# Allegro board Beamforming_PCB_Ver1_0_1.brd
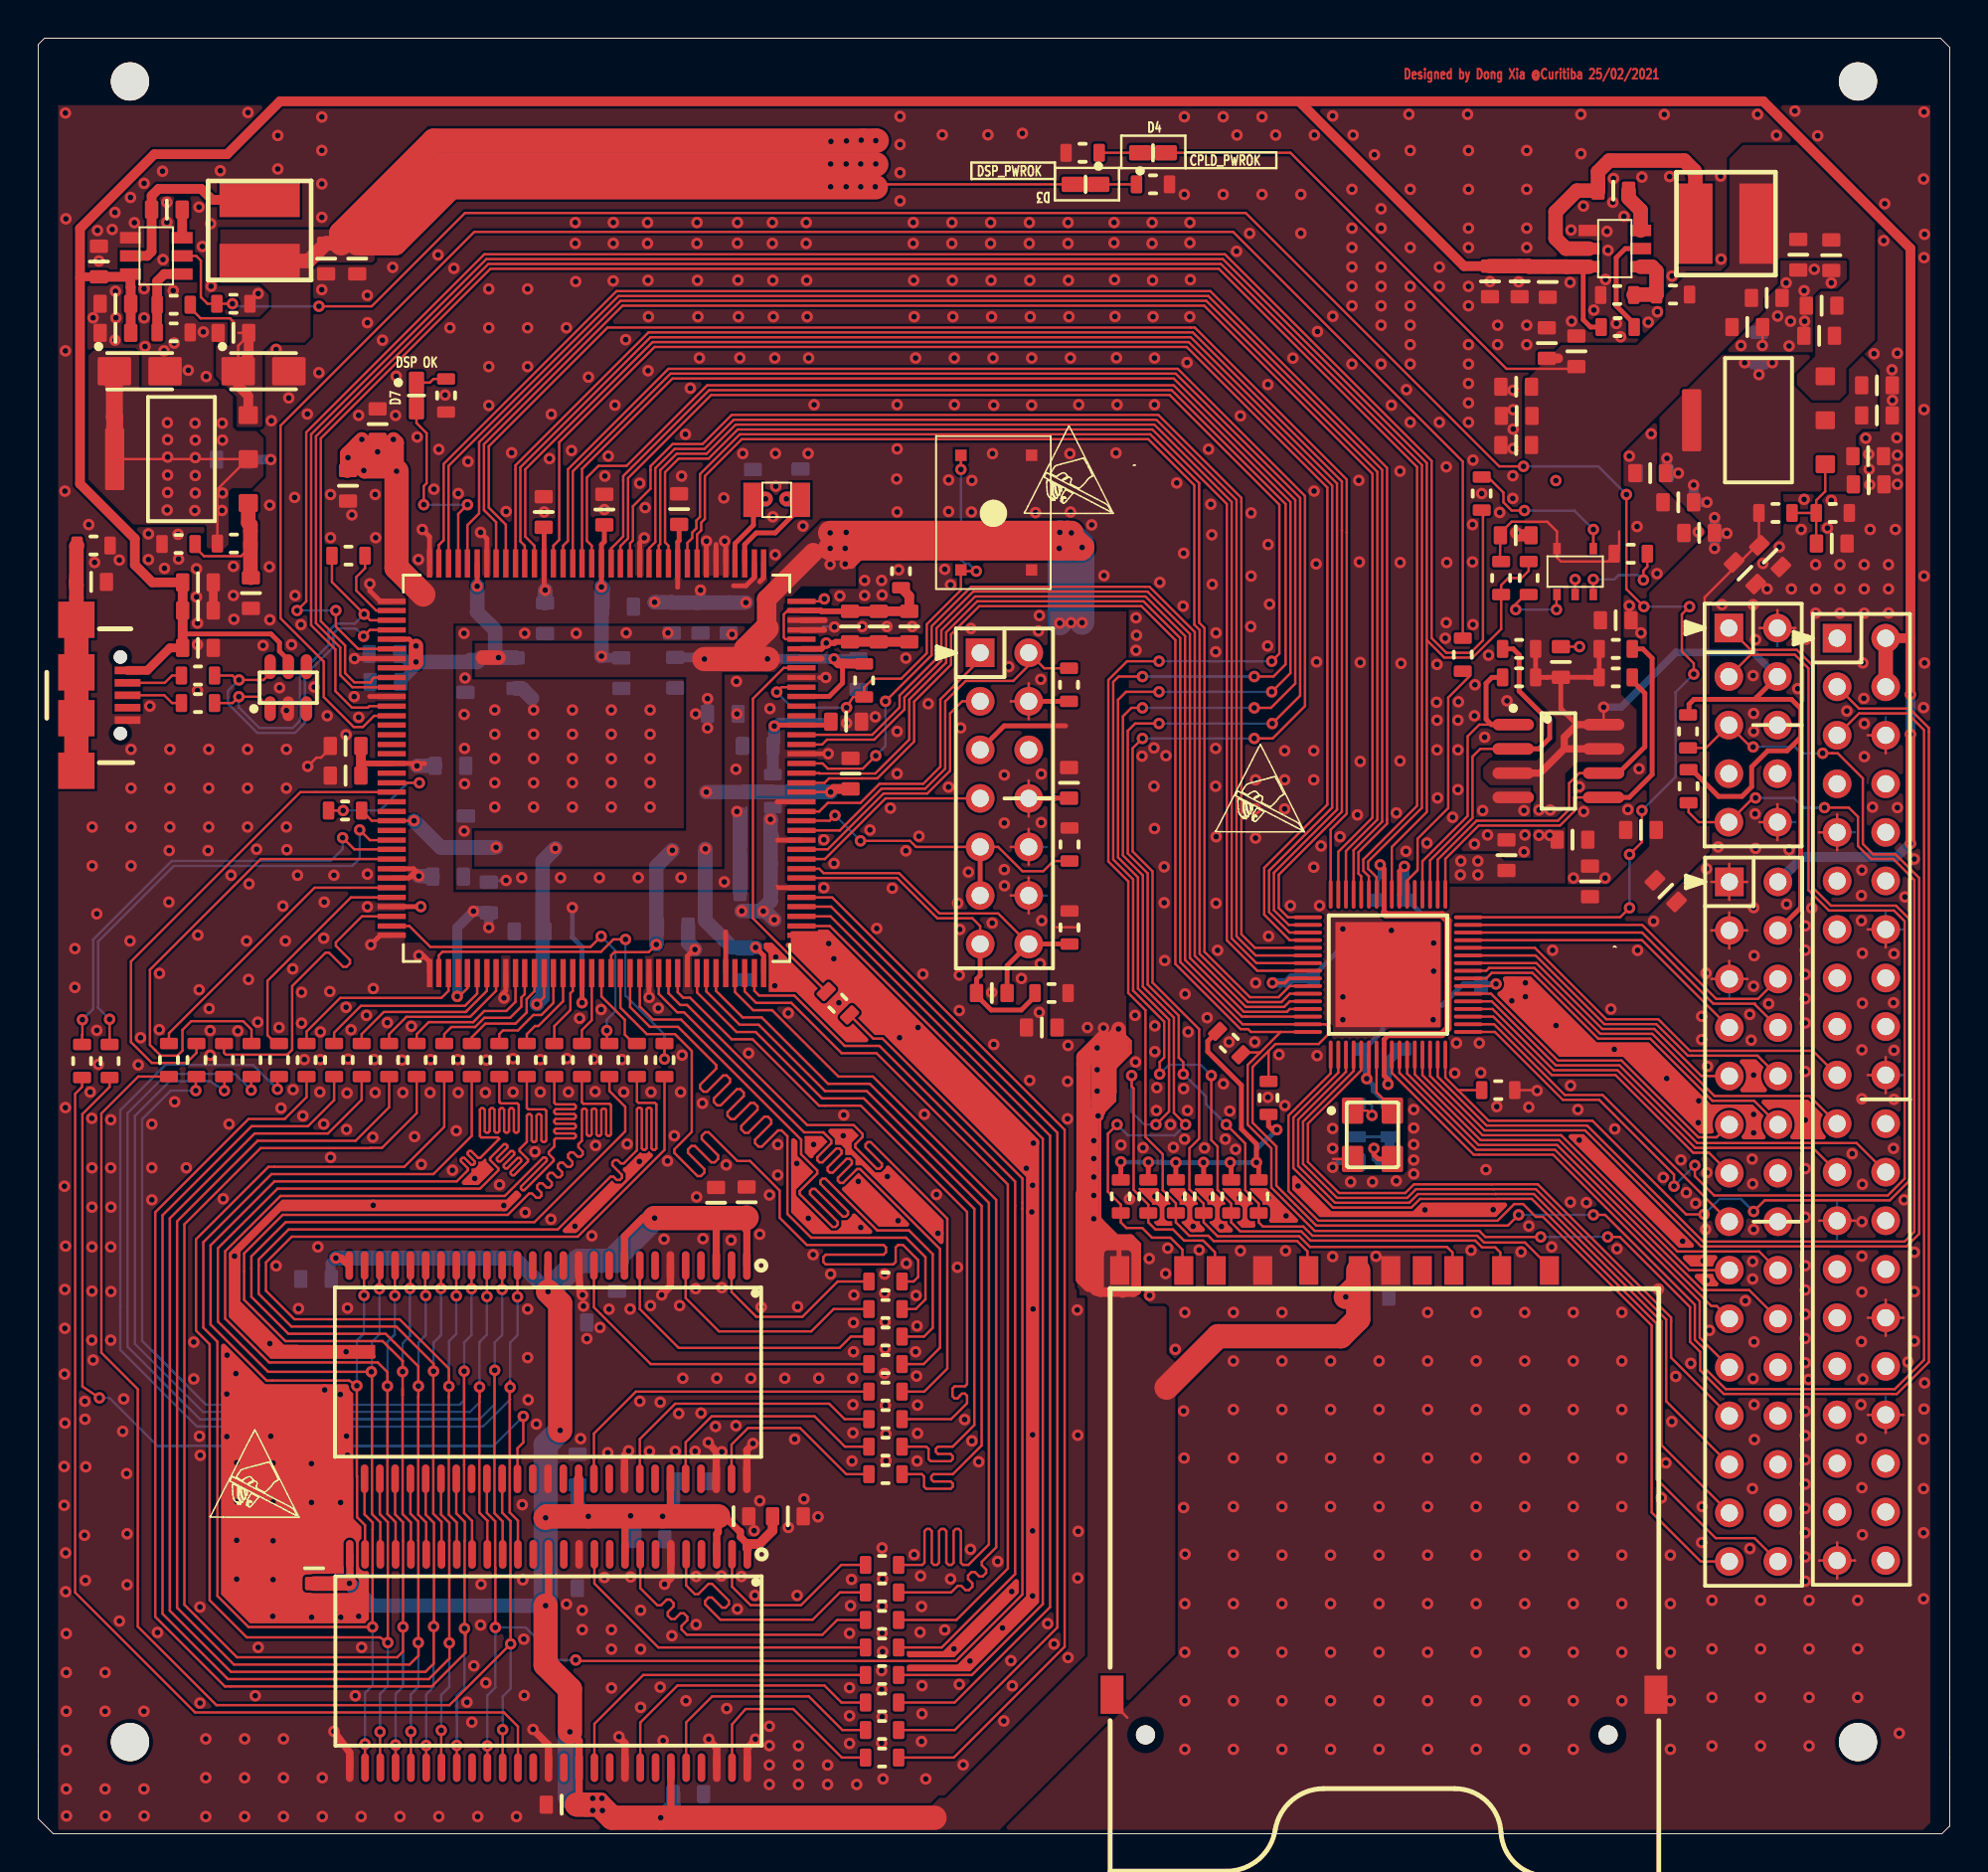
[diagram p0: board, top side]
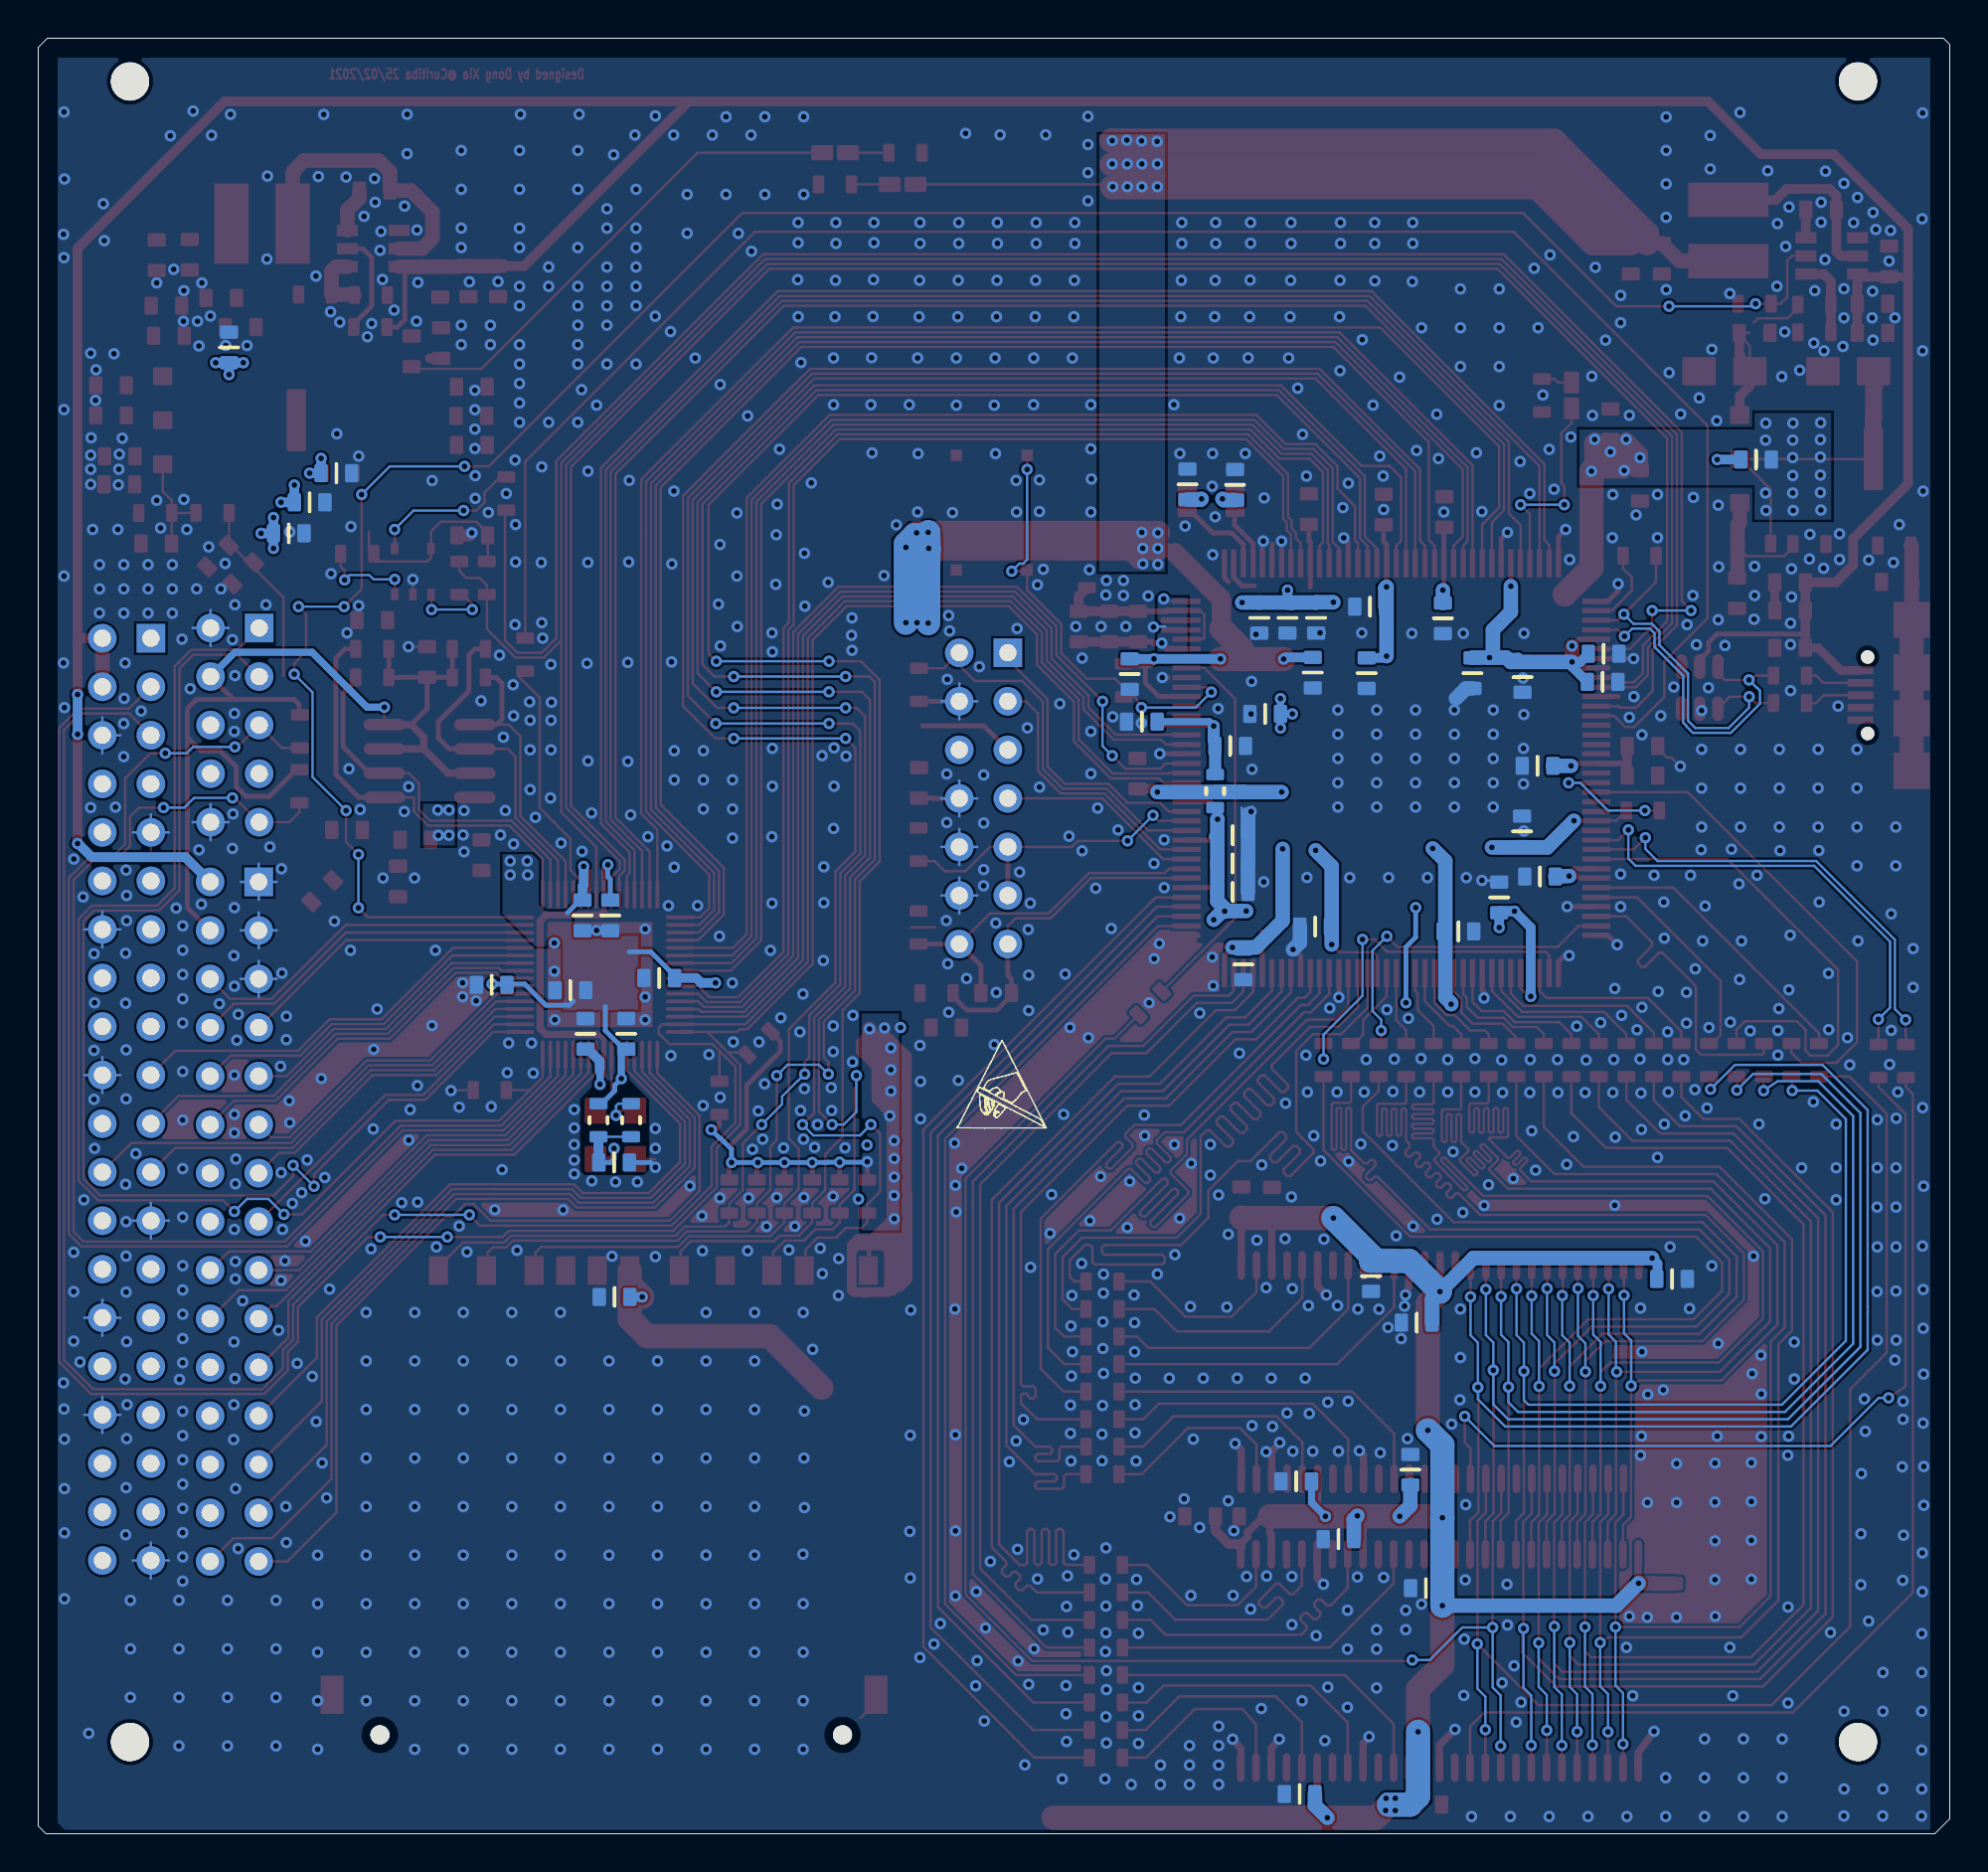
[diagram p1: board, bottom side, seen from below]

Outline 100 x 93.95 mm; copper layers: TOP, BOTTOM. Coordinates in mm from the lower left corner of the outline.
Outline path: 0,93.62 0,0.79 0.79,0 99.59,0 100,0.41 100,93.47 99.52,93.95 0.33,93.95 0,93.62

## Design rules (mm)
net group DSP_D0: nets DSP_D0 SEMC_D0
net group DSP_D1: nets DSP_D1 SEMC_D1
net group DSP_D2: nets DSP_D2 SEMC_D2
net group DSP_D3: nets DSP_D3 SEMC_D3
net group DSP_D4: nets DSP_D4 SEMC_D4
net group DSP_D5: nets DSP_D5 SEMC_D5
net group DSP_D6: nets DSP_D6 SEMC_D6
net group DSP_D7: nets DSP_D7 SEMC_D7
net group DSP_D8: nets DSP_D8 SEMC_D8
net group DSP_D9: nets DSP_D9 SEMC_D9
net group DSP_D10: nets DSP_D10 SEMC_D10
net group DSP_D11: nets DSP_D11 SEMC_D11
net group DSP_D12: nets DSP_D12 SEMC_D12
net group DSP_D13: nets DSP_D13 SEMC_D13
net group DSP_D14: nets DSP_D14 SEMC_D14
net group DSP_D15: nets DSP_D15 SEMC_D15
net group SDA10: nets DSP_SDA10 SDA10
net group SEMC_A0: nets DSP_A0 SEMC_A0
net group SEMC_A1: nets DSP_A1 SEMC_A1
net group SEMC_A2: nets DSP_A2 SEMC_A2
net group SEMC_A3: nets DSP_A3 SEMC_A3
net group SEMC_A4: nets DSP_A4 SEMC_A4
net group SEMC_A5: nets DSP_A5 SEMC_A5
net group SEMC_A6: nets DSP_A6 SEMC_A6
net group SEMC_A7: nets DSP_A7 SEMC_A7
net group SEMC_A8: nets DSP_A8 SEMC_A8
net group SEMC_A9: nets DSP_A9 SEMC_A9
net group SEMC_A10: nets DSP_A10 SEMC_A10
net group SEMC_A12: nets DSP_A12 SEMC_A12
net group SEMC_A13: nets DSP_A13 SEMC_A13
net group SEMC_CAS: nets DSP_CAS SEMC_CAS
net group SEMC_CKE: nets DSP_CKE SEMC_CKE
net group SEMC_CLK: nets DSP_CLK SEMC_CLK
net group SEMC_CS_SDR: nets DSP_CS_SDR SEMC_CS_SDR
net group SEMC_DM0: nets DSP_DM0 SEMC_DM0
net group SEMC_DM1: nets DSP_DM1 SEMC_DM1
net group SEMC_RAS: nets DSP_RAS SEMC_RAS
net group SEMC_WE: nets DSP_WE SEMC_WE

## Placement (name value [footprint] x y rotation side)
C1  0.1uF  [CAP0603]  30.51 60.73 270 bottom
C2  0.1uF  [CAP0603]  33.2 47.47 0 bottom
C3  0.1uF  [CAP0603]  33.32 60.76 270 bottom
C4  0.1uF  [CAP0603]  42.9 60.68 270 bottom
C5  0.1uF  [CAP0603]  35.81 58.6 0 bottom
C6  0.1uF  [CAP0603]  30.33 64.21 0 bottom
C7  0.1uF  [CAP0603]  18.11 61.75 180 bottom
C8  0.1uF  [CAP0603]  24.97 60.73 270 bottom
C9  0.1uF  [CAP0603]  18.16 60.27 180 bottom
C10  0.1uF  [CAP0603]  42.49 55.47 90 top
C11  0.1uF  [CAP0603]  36.96 45.49 270 bottom
C12  0.1uF  [CAP0603]  25.7 47.22 180 bottom
C13  0.1uF  [CAP0603]  22.38 52.45 90 bottom
C14  0.1uF  [CAP0603]  22.35 60.53 270 bottom
C15  0.1uF  [CAP0603]  52.5 42.19 180 top
C16  0.1uF  [CAP0603]  29.62 69.29 90 top
C17  0.1uF  [CAP0603]  21.44 50.09 0 bottom
C18  0.1uF  [CAP0603]  21.56 55.88 0 bottom
C19  0.1uF  [CAP0603]  16.08 56.92 180 top
C20  0.1uF  [CAP0603]  37.52 49.28 180 bottom
C21  0.1uF  [CAP0603]  37.52 50.77 180 bottom
C22  0.1uF  [CAP0603]  37.52 52.25 180 bottom
C23  0.1uF  [CAP0603]  26.52 63.6 270 bottom
C24  0.1uF  [CAP0603]  33.15 63.63 270 bottom
C25  0.1uF  [CAP0603]  36.12 63.63 270 bottom
C26  0.1uF  [CAP0603]  34.65 63.63 270 bottom
C27  0.1uF  [CAP0603]  17.75 73.76 90 top
C28  0.1uF  [CAP0603]  16.21 70.54 270 top
C29  0.1uF  [CAP0603]  33.53 69.32 90 top
C30  0.1uF  [CAP0603]  26.44 69.16 90 top
C31  0.1uF  [CAP0603]  16.08 55.37 180 top
C32  0.1uF  [CAP0603]  23.57 49 90 bottom
C33  0.1uF  [CAP0603]  42.47 63.17 270 top
C34  0.1uF  [CAP0603]  43.97 63.17 270 top
C35  0.1uF  [CAP0603]  45.57 63.17 270 top
C36  0.1uF  [CAP0603]  53.92 54.99 270 top
C44  18pF  [CAP0603]  37.39 70.59 90 bottom
C45  18pF  [CAP0603]  39.88 70.61 90 bottom
C48  0.1uF  [CAP0603]  6.73 84.99 180 top
C49  22uF  [CAP0805]  15.06 82.42 90 top
C50  47uF  [CAP0805]  3.17 82.27 270 top
C52  4.7uF  [CAP0805]  69.85 28.09 0 bottom
C59  0.1uF  [CAP0603]  10.21 78.54 180 top
C60  0.1uF  [CAP0603]  10.13 71.91 0 bottom
C61  10uF  [CAPMP3216X120]  5.31 76.53 0 top
C62  10uF  [CAPMP3216X120]  11.79 76.53 0 top
C67  10pF  [CAP0603]  2.77 65.51 0 top
C71  47uF  [CAP0805]  8.36 64.01 0 top
C72  2.2uF  [CAP0805]  8.36 65.48 0 top
C73  0.1uF  [CAP0603]  8.36 62.05 0 top
C74  20uF  [CAP0603]  37.06 33.05 90 top
C75  4.7uF  [CAP0805]  35.46 33.02 90 top
C76  0.1uF  [CAP0603]  30.28 29.18 270 bottom
C77  0.1uF  [CAP0603]  28.22 19.05 90 bottom
C78  0.1uF  [CAP0603]  27.89 26.75 0 bottom
C79  0.1uF  [CAP0603]  34.19 18.44 0 bottom
C80  0.1uF  [CAP0603]  14.53 29.03 180 bottom
C83  0.1u  [CAP0603]  42.27 58.19 0 top
C84  0.1u  [CAP0603]  42.27 58.19 0 bottom
C85  0.1u  [CAP0603]  37.64 56.92 180 bottom
C86  20uF  [CAP0603]  36.37 16.61 0 top
C87  4.7uF  [CAP0805]  39.22 16.61 0 top
C88  0.1uF  [CAP0603]  31.98 15.42 0 bottom
C89  0.1uF  [CAP0603]  27.41 12.85 0 bottom
C90  0.1uF  [CAP0603]  14.43 13.89 90 top
C91  0.1uF  [CAP0603]  27.38 1.52 180 top
C92  0.1uF  [CAP0603]  34.01 2.08 0 bottom
C95  10uF  [CAP0805]  4.04 80.06 0 top
C96  10uF  [CAP0805]  4.04 78.54 0 top
C97  0.1uF  [CAP0603]  16.69 82.42 90 top
C98  10uF  [CAP0805]  11.13 64.92 270 top
C99  0.1uF  [CAP0603]  82.4 85.98 180 top
C100  22uF  [CAP0805]  92.08 82.63 90 top
C101  47uF  [CAP0805]  75.95 81.23 90 top
C102  10uF  [CAP0805]  77.5 81.23 90 top
C103  10uF  [CAP0805]  78.97 81.2 90 top
C104  0.1uF  [CAP0603]  93.8 82.6 90 top
C105  0.1uF  [CAP0603]  93.29 79.96 180 top
C106  0.1uF  [CAP0603]  96.19 75.79 0 top
C107  1uF  [CAP0805]  96.19 74.22 0 top
C108  1uF  [CAP0805]  93.17 78.38 180 top
C109  10uF  [CAP0805]  93.83 67.51 0 top
C110  0.22uF  [CAP0603]  77.29 67.95 0 top
C111  0.1uF  [CAP0603]  49.89 43.99 0 top
C112  0.1uF  [CAP0603]  79.65 61.32 90 top
C113  0.1uF  [CAP0603]  72.16 44.15 0 bottom
C114  0.1uF  [CAP0603]  69.24 41.86 90 bottom
C115  0.1uF  [CAP0603]  67.51 44.78 0 bottom
C116  0.1uF  [CAP0603]  71.52 48.06 270 bottom
C117  0.1uF  [CAP0603]  80.26 52.02 0 top
C118  0.1uF  [CAP0603]  76.28 44.42 0 bottom
C119  0.1uF  [CAP0603]  76.81 51.21 90 top
C120  0.1uF  [CAP0603]  82.52 63.5 0 top
C121  0.1uF  [CAP0603]  77.32 75.72 180 top
C122  0.1uF  [CAP0603]  77.34 74.19 180 top
C123  0.1uF  [CAP0603]  77.32 72.67 180 top
C124  0.1uF  [CAP0603]  80.47 77.57 90 top
C125  0.1uF  [CAP0603]  78.92 78 90 top
C126  0.1uF  [CAP0603]  90.42 80.37 0 top
C127  0.1uF  [CAP0603]  89.41 78.84 0 top
C128  0.1uF  [CAP0603]  85.8 69.67 180 top
C129  0.1uF  [CAP0603]  86.89 68.07 180 top
C130  0.1uF  [CAP0603]  89.28 65.96 315 top
C131  0.1uF  [CAP0603]  90.6 66.85 315 top
C132  0.1uF  [CAP0603]  84.33 71.2 180 top
C133  0.1uF  [CAP0603]  85.14 49.33 315 top
C134  0.1uF  [CAP0603]  81.18 49.83 90 top
C135  0.1uF  [CAP0603]  83.85 52.53 180 top
C136  0.1uF  [CAP0603]  95.76 70.61 0 top
C137  0.1uF  [CAP0603]  90.02 77.77 90 bottom
C138  0.1uF  [CAP0603]  71.37 41.86 90 bottom
C139  0.1uF  [CAP0603]  84.4 71.2 180 bottom
C140  0.1uF  [CAP0603]  86.89 68.05 180 bottom
C141  0.1uF  [CAP0603]  85.8 69.67 180 bottom
C142  0.1uF  [CAP0603]  95.73 72.09 0 top
C143  0.1uF  [CAP0603]  70.07 48.06 270 bottom
C144  0.22uF  [CAP0603]  69.88 35.13 180 bottom
D3  LED  [LED0603]  54.79 86.31 180 top
D4  LED  [LED0603]  58.32 87.96 0 top
D7  LED  [LED0603]  19.79 75.26 270 top
J1  HEADER 7X2  [HDR254M-2X7]  49.28 61.8 270 top
J9  USB_MICROAB_RECEPTACLE  [MICROQTJ]  -0.15 65.07 270 top
J10  HEADER 20X2  [HDR254M-2X20]  94.11 62.56 270 top
J11  HEADER 15X2  [HDR254M-2X15]  88.47 49.81 270 top
J13  HEADER 5X2  [HDR254M-2X5]  88.44 63.09 270 top
L2  BEAD FERRITE  [RES0603]  45.14 66.07 270 top
L3  BEAD FERRITE  [RES0603]  38.43 54.56 90 bottom
L4  3.3uH  [CKCS5040-3_3UH]  11.3 85.83 270 top
L5  3.3uH  [CKCS5040-3_3UH]  86.36 83.97 0 top
L6  BEAD FERRITE  [RES0603]  70.69 37.34 90 bottom
NOREF  -  [unnamed]  4.8 91.69 0 top
NOREF#2  -  [unnamed]  95.2 91.69 0 top
NOREF#3  -  [#2]  98.55 0 90 top
NOREF#4  -  [#2]  0 93.6 0 top
NOREF#5  -  [#2]  51.56 69.09 0 top
NOREF#6  -  [#2]  56.64 69.65 0 top
NOREF#7  -  [#2]  61.57 52.43 0 top
NOREF#8  -  [#2]  8.97 16.56 0 top
NOREF#9  -  [#2]  81.76 44.45 0 top
NOREF#10  -  [unnamed]  4.8 4.8 0 top
NOREF#11  -  [unnamed]  95.2 4.8 0 top
NOREF#12  -  [#2]  51.94 36.93 180 bottom
P2  SDSOCKET  [SD-106M]  55.58 -6.27 0 top
R1  10K  [RES0603]  53.95 51.77 90 top
R2  1K  [RES0603]  53.01 43.99 0 top
R3  1K  [RES0603]  53.95 47.42 90 top
R4  1K  [RES0603]  53.92 60.12 270 top
R6  220Ohm  [RES0603]  58.32 86.31 180 top
R51  33.2K  [RES0603]  7.09 80.01 180 top
R52  10K  [RES0603]  7.09 78.56 180 top
R57  10K  [RES0603]  10.21 80.06 180 top
R58  10K  [RES0603]  83.31 66.98 180 top
R59  10K  [RES0603]  77.97 65.71 270 top
R60  10K  [RES0603]  76.53 65.71 270 top
R61  1M  [RES0603]  2.9 67.41 0 top
R133  10K  [RES0603]  59.51 33.35 90 top
R134  10K  [RES0603]  60.97 33.35 90 top
R135  20Ohm  [RES0603]  8.36 60.61 0 top
R136  20Ohm  [RES0603]  8.36 59.17 0 top
R137  4.7K  [RES0603]  64.36 38.51 90 top
R138  4.7K  [RES0603]  62.31 41.38 315 top
R139  0Ohm  [RES0603]  74.52 61.7 90 top
R142  30Ohm  [RES0603]  31.32 40.49 270 top
R143  30Ohm  [RES0603]  28.44 40.49 270 top
R144  30Ohm  [RES0603]  27 40.49 270 top
R145  30Ohm  [RES0603]  25.56 40.49 270 top
R146  30Ohm  [RES0603]  24.12 40.49 270 top
R147  30Ohm  [RES0603]  22.68 40.49 270 top
R148  30Ohm  [RES0603]  21.24 40.49 270 top
R149  30Ohm  [RES0603]  19.8 40.49 270 top
R150  30Ohm  [RES0603]  18.36 40.49 270 top
R151  30Ohm  [RES0603]  16.92 40.49 270 top
R152  30Ohm  [RES0603]  15.48 40.49 270 top
R154  30Ohm  [RES0603]  14.04 40.49 270 top
R155  30Ohm  [RES0603]  32.76 40.49 270 top
R156  30Ohm  [RES0603]  29.88 40.49 270 top
R157  30Ohm  [RES0603]  9.72 40.49 270 top
R158  30Ohm  [RES0603]  12.6 40.49 270 top
R159  30Ohm  [RES0603]  6.84 40.49 270 top
R160  30Ohm  [RES0603]  11.16 40.49 270 top
R161  30Ohm  [RES0603]  41.83 43.46 315 top
R162  30Ohm  [RES0603]  8.28 40.49 90 top
R163  30Ohm  [RES0603]  3.73 40.44 90 top
R164  30Ohm  [RES0603]  2.29 40.44 90 top
R165  30Ohm  [RES0603]  44.32 28.9 0 top
R166  30Ohm  [RES0603]  44.32 27.46 0 top
R167  30Ohm  [RES0603]  44.32 26.02 0 top
R168  30Ohm  [RES0603]  44.32 24.58 0 top
R169  30Ohm  [RES0603]  44.32 23.14 0 top
R170  30Ohm  [RES0603]  44.32 21.7 0 top
R171  30Ohm  [RES0603]  44.32 20.26 0 top
R172  30Ohm  [RES0603]  44.32 18.82 0 top
R173  30Ohm  [RES0603]  44.15 14.07 0 top
R174  30Ohm  [RES0603]  44.15 12.63 0 top
R175  30Ohm  [RES0603]  44.15 11.19 0 top
R176  30Ohm  [RES0603]  44.15 9.75 0 top
R177  30Ohm  [RES0603]  44.15 8.31 0 top
R178  30Ohm  [RES0603]  44.15 6.87 0 top
R179  30Ohm  [RES0603]  44.15 5.43 0 top
R180  30Ohm  [RES0603]  44.15 3.99 0 top
R181  10K  [RES0603]  7.34 67.49 0 top
R182  2.8K  [RES0603]  10.24 67.51 180 top
R183  10K  [RES0603]  82.63 78.84 180 top
R184  10K  [RES0603]  82.6 80.52 0 top
R185  33.2K  [RES0603]  85.52 80.54 180 top
R186  10K  [RES0603]  93.88 69.11 180 top
R187  2.8K  [RES0603]  90.88 69.11 180 top
R188  220Ohm  [RES0603]  54.64 87.96 0 top
R189  1.5K  [RES0603]  16.23 66.88 0 top
R190  10K  [RES0603]  56.63 33.35 90 top
R191  10K  [RES0603]  58.07 33.35 90 top
R192  10K  [RES0603]  63.85 33.35 90 top
R193  10K  [RES0603]  62.41 33.35 90 top
R194  1K  [RES0603]  76.38 38.91 0 top
R195  1K  [RES0603]  86.31 57.68 90 top
R196  1K  [RES0603]  86.33 54.81 90 top
R197  4.7K  [RES0603]  77.47 60.51 0 top
R198  4.7K  [RES0603]  77.47 62 0 top
R199  4.7K  [RES0603]  82.52 60.51 0 top
R200  4.7K  [RES0603]  82.52 62 0 top
R201  220Ohm  [RES0603]  21.34 75.26 90 top
R202  4.7K  [RES0603]  43.21 60.35 270 top
R203  4.7K  [RES0603]  68.99 37.34 270 bottom
R204  2.2K  [RES0603]  16.05 53.54 0 top
R205  220Ohm  [RES0603]  75.51 70.13 270 top
SW3  SW_TC_SPST  [SPST_BUTTON]  51.97 67.13 90 top
U1  5M40ZE64C5N  [QFP40P900X900X120-65N]  70.61 44.96 90 top
U2  TMS320VC5509APGE  [QFP50P2200X2200X160-144N]  29.21 55.75 0 top
U15  -  [TPS562201]  4.83 83.52 0 top
U18  AMS1117  [SOT223]  7.49 71.93 90 top
U20  STWD100NYWY3F  [STWD100]  79.45 64.85 90 top
U21  -  [SRV05-4-N]  13.08 59.97 0 top
U22  MT48LC8M8A2  [TSOP80P1175X120-54]  26.67 24.16 180 top
U23  MT48LC8M8A2  [TSOP80P1175X120-54]  26.7 9.04 180 top
U24  -  [TPS562201]  81.13 83.9 0 top
U25  AMS1117  [SOT223]  89.99 73.96 90 top
U26  AT25256B  [SOIC127P600X175-8]  79.53 56.13 270 top
Y2  32768Hz  [32768KHZCRYSTAL]  38.63 69.8 0 top
Y3  Oscillator 24MHz  [OSCCC250X320X100]  69.8 36.58 0 top

## Library data of the parts
C1-C35 = CAP NP: User Part Number: pn; Tolerance: RichardLC; room: DSP_CAPS
C36 C111 = CAP NP: User Part Number: pn; Tolerance: RichardLC; room: DSP_JTAG
C44 C45 = CAP NP: User Part Number: pn; Tolerance: RichardLC; room: DSP_CRY
C48-C50 C59 C60 C95-C98 = CAP NP: User Part Number: pn; Tolerance: RichardLC; room: PWR_DSP
C52 = CAP NP: User Part Number: pn; Tolerance: RichardLC; room: DSP_SD
C61 C62 = CAP POL: User Part Number: pn; Tolerance: RichardLC; room: PWR_DSP
C67 = CAP NP: User Part Number: pn; Tolerance: RichardLC; room: DSP_USB
C71-C73 = CAPACITOR NON-POL: User Part Number: pn; Tolerance: RichardLC; room: DSP_USB
C74-C80 C86-C92 = CAPACITOR NON-POL: User Part Number: pn; Tolerance: RichardLC; room: SDRAM
C83-C85 = CAP NP: User Part Number: pn; Tolerance: RichardLC; room: DSP
C99-C106 C109 = CAP NP: User Part Number: pn; Tolerance: RichardLC; room: PWR_CPLD
C107 C108 = CAP POL: User Part Number: pn; Tolerance: RichardLC; room: PWR_CPLD
C110 C144 = CAP NP: User Part Number: pn; Tolerance: RichardLC; room: DSP_WDOG
C112-C143 = CAP NP: User Part Number: pn; Tolerance: RichardLC; room: CPLD_CAPS
D3 D4 = LED: User Part Number: pn; Tolerance: RichardLC; room: PWR
D7 = LED: User Part Number: pn; Tolerance: RichardLC; room: DSP_LED
J1 = HEADER 7X2: User Part Number: pn; Tolerance: RichardLC; room: DSP_JTAG
J9 = USB_MINI_AB_RECEPTACLE: room: DSP_USB
J10 = HEADER 20X2: User Part Number: pn; Tolerance: RichardLC; room: CONNECTOR
J11 = HEADER 15X2: User Part Number: pn; Tolerance: RichardLC; room: CONNECTOR
J13 = HEADER 5X2: User Part Number: pn; Tolerance: RichardLC; room: CPLD_JTAG
L2 L3 = BEAD FERRITE: User Part Number: pn; Tolerance: RichardLC; room: PWR_DSP
L4 = INDUCTOR: room: PWR_DSP
L5 = INDUCTOR: room: PWR_CPLD
L6 = BEAD FERRITE: User Part Number: pn; Tolerance: RichardLC; room: CPLD_CRY
P2 = SDSOCKET: room: DSP_SD
R1-R4 = RESISTOR: User Part Number: pn; Tolerance: RichardLC; room: DSP_JTAG
R6 R188 = RESISTOR: User Part Number: pn; Tolerance: RichardLC; room: PWR
R51 R52 R57 R181 R182 R202 = RESISTOR: User Part Number: pn; Tolerance: RichardLC; room: PWR_DSP
R58-R60 = RESISTOR: User Part Number: pn; Tolerance: RichardLC; room: DSP_WDOG
R61 R135 R136 = RESISTOR: User Part Number: pn; Tolerance: RichardLC; room: DSP_USB
R133 R134 R190-R193 = RESISTOR: User Part Number: pn; Tolerance: RichardLC; room: DSP_SD
R137-R139 R189 = RESISTOR: User Part Number: pn; Tolerance: RichardLC; room: DSP
R142-R152 R154-R180 = RESISTOR: User Part Number: pn; Tolerance: RichardLC; signal model: RESISTOR_RES0603_30OHM_30Ohm; room: SDRAM
R183-R187 = RESISTOR: User Part Number: pn; Tolerance: RichardLC; room: PWR_CPLD
R194-R196 = RESISTOR: User Part Number: pn; Tolerance: RichardLC; room: CPLD_JTAG
R197-R200 = RESISTOR: User Part Number: pn; Tolerance: RichardLC; room: CPLD_EEPROM
R201 R205 = RESISTOR: User Part Number: pn; Tolerance: RichardLC; room: DSP_LED
R203 = RESISTOR: User Part Number: pn; Tolerance: RichardLC; room: CPLD_CRY
R204 = RESISTOR: User Part Number: pn; Tolerance: RichardLC; room: SDRAM
SW3 = SW_TC_SPST: room: PWR
U1 = 5M40ZE64C5N_2
U2 = TMS340VC5509APGE: room: DSP
U15 = TPS562201: room: PWR_DSP
U18 = AMS1117: User Part Number: pn; Tolerance: RichardLC; room: PWR_DSP
U20 = STWD100NYWY3F: room: DSP_WDOG
U21 = SESOT12CLC: User Part Number: pn; Tolerance: RichardLC; room: DSP_USB
U22 U23 = MT48LC8M8A2: User Part Number: pn; Tolerance: RichardLC; room: SDRAM
U24 = TPS562201: room: PWR_CPLD
U25 = AMS1117: User Part Number: pn; Tolerance: RichardLC; room: PWR_CPLD
U26 = AT25256B: User Part Number: pn; Tolerance: RichardLC; room: CPLD_EEPROM
Y2 = CRYSTAL_1: room: DSP_CRY
Y3 = Crystal_0: User Part Number: pn; Tolerance: RichardLC; room: CPLD_CRY

## Footprints (pads in the part's own frame, mm; a bottom-side part is the same pattern mirrored in y, then rotated)
32768KHZCRYSTAL
  rect 1x1.8 smd: 1(-1.25,0) 2(1.25,0)
CAP0603
  custom 0.7x0.95 smd: 1(-0.8,0) 2(0.8,0)
CAP0805
  custom 0.7x0.95 smd: 1(-0.8,0) 2(0.8,0)
CAPMP3216X120
  custom 1.75x1.484 smd: 1(-1.325,0) 2(1.325,0)
CKCS5040-3_3UH
  rect 1.8x4.2 smd: 1(0.33,0.279) 2(3.53,0.279)
HDR254M-2X5
  rect 1.5x1.5 hole 0.9: 1(0,0)
  round 1.5 hole 0.9: 2(0,2.54) 3(2.54,0) 4(2.54,2.54) 5(5.08,0) 6(5.08,2.54) 7(7.62,0) 8(7.62,2.54) 9(10.16,0) 10(10.16,2.54)
HDR254M-2X7
  rect 1.5x1.5 hole 0.9: 1(0,0)
  round 1.5 hole 0.9: 2(0,2.54) 3(2.54,0) 4(2.54,2.54) 5(5.08,0) 6(5.08,2.54) 7(7.62,0) 8(7.62,2.54) 9(10.16,0) 10(10.16,2.54) 11(12.7,0) 12(12.7,2.54) 13(15.24,0) 14(15.24,2.54)
HDR254M-2X15
  rect 1.5x1.5 hole 0.9: 1(0,0)
  round 1.5 hole 0.9: 2(0,2.54) 3(2.54,0) 4(2.54,2.54) 5(5.08,0) 6(5.08,2.54) 7(7.62,0) 8(7.62,2.54) 9(10.16,0) 10(10.16,2.54) 11(12.7,0) 12(12.7,2.54) 13(15.24,0) 14(15.24,2.54) 15(17.78,0) 16(17.78,2.54) 17(20.32,0) 18(20.32,2.54) 19(22.86,0) 20(22.86,2.54) 21(25.4,0) 22(25.4,2.54) 23(27.94,0) 24(27.94,2.54) 25(30.48,0) 26(30.48,2.54) 27(33.02,0) 28(33.02,2.54) 29(35.56,0) 30(35.56,2.54)
HDR254M-2X20
  rect 1.5x1.5 hole 0.9: 1(0,0)
  round 1.5 hole 0.9: 2(0,2.54) 3(2.54,0) 4(2.54,2.54) 5(5.08,0) 6(5.08,2.54) 7(7.62,0) 8(7.62,2.54) 9(10.16,0) 10(10.16,2.54) 11(12.7,0) 12(12.7,2.54) 13(15.24,0) 14(15.24,2.54) 15(17.78,0) 16(17.78,2.54) 17(20.32,0) 18(20.32,2.54) 19(22.86,0) 20(22.86,2.54) 21(25.4,0) 22(25.4,2.54) 23(27.94,0) 24(27.94,2.54) 25(30.48,0) 26(30.48,2.54) 27(33.02,0) 28(33.02,2.54) 29(35.56,0) 30(35.56,2.54) 31(38.1,0) 32(38.1,2.54) 33(40.64,0) 34(40.64,2.54) 35(43.18,0) 36(43.18,2.54) 37(45.72,0) 38(45.72,2.54) 39(48.26,0) 40(48.26,2.54)
LED0603
  custom 1.15x0.8 smd: 1(-0.675,0) 2(0.675,0)
MICROQTJ
  round 0.7 hole 0.8 unplated: (3.5,4.45) (7.5,4.45)
  rect 0.4x1.35 smd: 1(4.2,4.825) 2(4.85,4.825) 3(5.5,4.825) 4(6.15,4.825) 5(6.8,4.825)
  rect 1.9x1.9 smd: S1(6.7,2.15) S2(1.55,2.15) S3(9.45,2.15) S4(4.3,2.15)
OSCCC250X320X100
  custom 1.12x1.37 smd: 1(-1.04,1.265) 2(-1.04,-1.265) 3(1.04,1.265) 4(1.04,-1.265)
QFP40P900X900X120-65N
  custom 1.5x0.2 smd: 1(-4.2,3) 2(-4.2,2.6) 3(-4.2,2.2) 4(-4.2,1.8) 5(-4.2,1.4) 6(-4.2,1) 7(-4.2,0.6) 8(-4.2,0.2) 9(-4.2,-0.2) 10(-4.2,-0.6) 11(-4.2,-1) 12(-4.2,-1.4) 13(-4.2,-1.8) 14(-4.2,-2.2) 15(-4.2,-2.6) 16(-4.2,-3) 33(4.2,-3) 34(4.2,-2.6) 35(4.2,-2.2) 36(4.2,-1.8) 37(4.2,-1.4) 38(4.2,-1) 39(4.2,-0.6) 40(4.2,-0.2) 41(4.2,0.2) 42(4.2,0.6) 43(4.2,1) 44(4.2,1.4) 45(4.2,1.8) 46(4.2,2.2) 47(4.2,2.6) 48(4.2,3)
  custom 0.2x1.5 smd: 17(-3,-4.2) 18(-2.6,-4.2) 19(-2.2,-4.2) 20(-1.8,-4.2) 21(-1.4,-4.2) 22(-1,-4.2) 23(-0.6,-4.2) 24(-0.2,-4.2) 25(0.2,-4.2) 26(0.6,-4.2) 27(1,-4.2) 28(1.4,-4.2) 29(1.8,-4.2) 30(2.2,-4.2) 31(2.6,-4.2) 32(3,-4.2) 49(3,4.2) 50(2.6,4.2) 51(2.2,4.2) 52(1.8,4.2) 53(1.4,4.2) 54(1,4.2) 55(0.6,4.2) 56(0.2,4.2) 57(-0.2,4.2) 58(-0.6,4.2) 59(-1,4.2) 60(-1.4,4.2) 61(-1.8,4.2) 62(-2.2,4.2) 63(-2.6,4.2) 64(-3,4.2)
  rect 5.5x5.5 smd: 65(0,0)
QFP50P2200X2200X160-144N
  rect 1.473x0.279 smd: 1(-10.719,8.738) 2(-10.719,8.255) 3(-10.719,7.747) 4(-10.719,7.239) 5(-10.719,6.756) 6(-10.719,6.248) 7(-10.719,5.74) 8(-10.719,5.258) 9(-10.719,4.75) 10(-10.719,4.242) 11(-10.719,3.759) 12(-10.719,3.251) 13(-10.719,2.743) 14(-10.719,2.261) 15(-10.719,1.753) 16(-10.719,1.245) 17(-10.719,0.762) 18(-10.719,0.254) 19(-10.719,-0.254) 20(-10.719,-0.762) 21(-10.719,-1.245) 22(-10.719,-1.753) 23(-10.719,-2.261) 24(-10.719,-2.743) 25(-10.719,-3.251) 26(-10.719,-3.759) 27(-10.719,-4.242) 28(-10.719,-4.75) 29(-10.719,-5.258) 30(-10.719,-5.74) 31(-10.719,-6.248) 32(-10.719,-6.756) 33(-10.719,-7.239) 34(-10.719,-7.747) 35(-10.719,-8.255) 36(-10.719,-8.738) 73(10.719,-8.738) 74(10.719,-8.255) 75(10.719,-7.747) 76(10.719,-7.239) 77(10.719,-6.756) 78(10.719,-6.248) 79(10.719,-5.74) 80(10.719,-5.258) 81(10.719,-4.75) 82(10.719,-4.242) 83(10.719,-3.759) 84(10.719,-3.251) 85(10.719,-2.743) 86(10.719,-2.261) 87(10.719,-1.753) 88(10.719,-1.245) 89(10.719,-0.762) 90(10.719,-0.254) 91(10.719,0.254) 92(10.719,0.762) 93(10.719,1.245) 94(10.719,1.753) 95(10.719,2.261) 96(10.719,2.743) 97(10.719,3.251) 98(10.719,3.759) 99(10.719,4.242) 100(10.719,4.75) 101(10.719,5.258) 102(10.719,5.74) 103(10.719,6.248) 104(10.719,6.756) 105(10.719,7.239) 106(10.719,7.747) 107(10.719,8.255) 108(10.719,8.738)
  rect 0.279x1.473 smd: 37(-8.738,-10.719) 38(-8.255,-10.719) 39(-7.747,-10.719) 40(-7.239,-10.719) 41(-6.756,-10.719) 42(-6.248,-10.719) 43(-5.74,-10.719) 44(-5.258,-10.719) 45(-4.75,-10.719) 46(-4.242,-10.719) 47(-3.759,-10.719) 48(-3.251,-10.719) 49(-2.743,-10.719) 50(-2.261,-10.719) 51(-1.753,-10.719) 52(-1.245,-10.719) 53(-0.762,-10.719) 54(-0.254,-10.719) 55(0.254,-10.719) 56(0.762,-10.719) 57(1.245,-10.719) 58(1.753,-10.719) 59(2.261,-10.719) 60(2.743,-10.719) 61(3.251,-10.719) 62(3.759,-10.719) 63(4.242,-10.719) 64(4.75,-10.719) 65(5.258,-10.719) 66(5.74,-10.719) 67(6.248,-10.719) 68(6.756,-10.719) 69(7.239,-10.719) 70(7.747,-10.719) 71(8.255,-10.719) 72(8.738,-10.719) 109(8.738,10.719) 110(8.255,10.719) 111(7.747,10.719) 112(7.239,10.719) 113(6.756,10.719) 114(6.248,10.719) 115(5.74,10.719) 116(5.258,10.719) 117(4.75,10.719) 118(4.242,10.719) 119(3.759,10.719) 120(3.251,10.719) 121(2.743,10.719) 122(2.261,10.719) 123(1.753,10.719) 124(1.245,10.719) 125(0.762,10.719) 126(0.254,10.719) 127(-0.254,10.719) 128(-0.762,10.719) 129(-1.245,10.719) 130(-1.753,10.719) 131(-2.261,10.719) 132(-2.743,10.719) 133(-3.251,10.719) 134(-3.759,10.719) 135(-4.242,10.719) 136(-4.75,10.719) 137(-5.258,10.719) 138(-5.74,10.719) 139(-6.248,10.719) 140(-6.756,10.719) 141(-7.239,10.719) 142(-7.747,10.719) 143(-8.255,10.719) 144(-8.738,10.719)
RES0603
  custom 0.6x0.94 smd: 1(-0.865,0) 2(0.865,0)
SD-106M
  round 1 hole 1.5 unplated: (2.35,11.45) (26.55,11.45)
  rect 1x1.5 smd: 1(20.98,35.75) 2(18.48,35.75) 3(15.18,35.75) 4(13.48,35.75) 5(10.89,35.75) 6(8.48,35.75) 7(6.05,35.75) 8(4.35,35.75) 9(23.48,35.75) 10(16.83,35.75) 11(1,35.75)
  rect 1.2x2 smd: 12(0.6,13.55) 13(29.05,13.55)
SOIC127P600X175-8
  oval 0.61x2.17 smd: 1(-1.905,-2.365) 2(-0.635,-2.365) 3(0.635,-2.365) 4(1.905,-2.365) 5(1.905,2.365) 6(0.635,2.365) 7(-0.635,2.365) 8(-1.905,2.365)
SOT223
  custom 0.94x1.01 smd: 1(-2.3,-3.495) 2(0,-3.495) 3(2.3,-3.495)
  custom 3.25x1.01 smd: 4(0,3.495)
SPST_BUTTON
  rect 0.6x0.6 smd: 1(-1,0) 2(5,0) 3(-1,3.7) 4(5,3.7)
SRV05-4-N
  oval 0.6x1.3 smd: 1(-0.95,-1.1) 2(0,-1.1) 3(0.95,-1.1) 4(0.95,1.1) 5(0,1.1) 6(-0.95,1.1)
STWD100
  rect 0.6x0.4 smd: 1(0,0) 2(0,-0.95) 3(0,-1.9) 4(2.4,-1.9) 5(2.4,0)
TPS562201
  rect 1.1x0.6 smd: 1(0,0) 2(0,-0.95) 3(0,-1.9) 4(2.7,-1.9) 5(2.7,-0.95) 6(2.7,0)
TSOP80P1175X120-54
  oval 0.4x1.5 smd: 1(-10.4,-5.58) 2(-9.6,-5.58) 3(-8.8,-5.58) 4(-8,-5.58) 5(-7.2,-5.58) 6(-6.4,-5.58) 7(-5.6,-5.58) 8(-4.8,-5.58) 9(-4,-5.58) 10(-3.2,-5.58) 11(-2.4,-5.58) 12(-1.6,-5.58) 13(-0.8,-5.58) 14(0,-5.58) 15(0.8,-5.58) 16(1.6,-5.58) 17(2.4,-5.58) 18(3.2,-5.58) 19(4,-5.58) 20(4.8,-5.58) 21(5.6,-5.58) 22(6.4,-5.58) 23(7.2,-5.58) 24(8,-5.58) 25(8.8,-5.58) 26(9.6,-5.58) 27(10.4,-5.58) 28(10.4,5.58) 29(9.6,5.58) 30(8.8,5.58) 31(8,5.58) 32(7.2,5.58) 33(6.4,5.58) 34(5.6,5.58) 35(4.8,5.58) 36(4,5.58) 37(3.2,5.58) 38(2.4,5.58) 39(1.6,5.58) 40(0.8,5.58) 41(0,5.58) 42(-0.8,5.58) 43(-1.6,5.58) 44(-2.4,5.58) 45(-3.2,5.58) 46(-4,5.58) 47(-4.8,5.58) 48(-5.6,5.58) 49(-6.4,5.58) 50(-7.2,5.58) 51(-8,5.58) 52(-8.8,5.58) 53(-9.6,5.58) 54(-10.4,5.58)
unnamed
  round 2 hole 2 unplated: (0,0)

## Nets
1V6D: C17.1 C18.1 C19.1 C20.1 C21.1 C22.1 C23.1 C24.1 C25.1 C26.1 C27.1 C28.1 C29.1 C30.1 C31.1 C32.1 C60.1 C61.1 L3.1 R182.2 U2.18(CVDD1) U2.29(CVDD2) U2.30(CVDD3) U2.41(CVDD4) U2.53(CVDD5) U2.68(CVDD6) U2.78(CVDD7) U2.83(CVDD8) U2.87(CVDD9) U2.109(RDVDD) U2.110(RCVDD) U2.118(CVDD10) U2.132(CVDD11) U18.2(VO) U18.4(VO_TAB)
1V8D: C106.1 C107.1 C128.1 C129.1 C130.1 C131.1 C132.1 C133.1 C134.1 C135.1 C136.1 C137.1 C138.1 C139.1 C140.1 C141.1 C142.1 C143.1 R187.2 U1.8(VCCINT@1) U1.41(VCCINT@2) U25.2(VO) U25.4(VO_TAB)
3V3CPLD: C100.2 C104.2 C105.1 C108.1 C110.1 C112.1 C113.1 C114.1 C115.1 C116.1 C117.1 C118.1 C119.1 C120.1 C121.1 C122.1 C123.1 C124.1 C125.1 C126.1 C127.1 D4.2(ANODE) J11.4 J13.4 L5.2 L6.2 R58.2 R60.1 R185.1 R195.2 R196.2 R197.2 R198.2 R199.1 R200.1 U1.6(VCCIO1@1) U1.23(VCCIO1@2) U1.39(VCCIO2@1) U1.57(VCCIO2@2) U20.5(VCC) U25.3(VI) U26.3(/WP) U26.7(/HOLD) U26.8(VCC)
3V3DSP: C1.1 C2.1 C3.1 C4.1 C5.1 C6.1 C7.1 C8.1 C9.1 C10.1 C11.1 C12.1 C13.1 C14.1 C15.1 C16.1 C36.1 C49.2 C52.1 C59.1 C62.1 C74.1 C75.1 C76.1 C77.1 C78.1 C79.1 C80.1 C86.1 C87.1 C88.1 C89.1 C90.1 C91.1 C92.1 C97.2 D3.2(ANODE) J1.5 L2.1 L4.2 P2.4(VDD) P2.11(WP) R1.2 R2.2 R3.2 R51.1 R133.2 R134.2 R137.1 R138.1 R190.2 R191.2 R192.2 R193.2 R202.1 R204.2 U2.5(USBVDD) U2.8(DVCC1) U2.24(DVCC2) U2.49(DVCC3) U2.56(DVCC4) U2.72(DVCC5) U2.88(DVCC6) U2.98(DVCC7) U2.126(DVCC8) U2.139(DVCC9) U18.3(VI) U22.1(VDD1) U22.3(VDDQ1) U22.9(VDDQ2) U22.14(VDD2) U22.27(VDD3) U22.43(VDDQ3) U22.49(VDDQ4) U23.1(VDD1) U23.3(VDDQ1) U23.9(VDDQ2) U23.14(VDD2) U23.27(VDD3) U23.43(VDDQ3) U23.49(VDDQ4)
5VIN: C50.2 C71.1 C72.1 C73.1 C95.2 C96.2 C101.2 C102.2 C103.2 J9.1(P1) J10.2 J10.4 J11.2 R183.2 U15.3(VIN) U21.5(VCC) U24.3(VIN)
AGND: C33.2 C34.2 C35.2 U2.103(ADVSS) U2.108(AVSS)
DGND: C1.2 C2.2 C3.2 C4.2 C5.2 C6.2 C7.2 C8.2 C9.2 C10.2 C11.2 C12.2 C13.2 C14.2 C15.2 C16.2 C17.2 C18.2 C19.2 C20.2 C21.2 C22.2 C23.2 C24.2 C25.2 C26.2 C27.2 C28.2 C29.2 C30.2 C31.2 C32.2 C36.2 C44.2 C45.2 C49.1 C50.1 C52.2 C59.2 C60.2 C61.2 C62.2 C67.2 C71.2 C72.2 C73.2 C74.2 C75.2 C76.2 C77.2 C78.2 C79.2 C80.2 C83.2 C84.2 C85.2 C86.2 C87.2 C88.2 C89.2 C90.2 C91.2 C92.2 C95.1 C96.1 C97.1 C98.2 C100.1 C101.1 C102.1 C103.1 C104.1 C105.2 C106.2 C107.2 C108.2 C109.2 C110.2 C112.2 C113.2 C114.2 C115.2 C116.2 C117.2 C118.2 C119.2 C120.2 C121.2 C122.2 C123.2 C124.2 C125.2 C126.2 C127.2 C128.2 C129.2 C130.2 C131.2 C132.2 C133.2 C134.2 C135.2 C136.2 C137.2 C138.2 C139.2 C140.2 C141.2 C142.2 C143.2 C144.2 J1.4 J1.8 J1.10 J1.12 J9.5(P5) J10.6 J10.9 J10.14 J10.20 J10.25 J10.30 J10.34 J10.39 J11.1 J11.3 J11.5 J13.2 J13.10 P2.3(VSS1) P2.6(VSS2) P2.12(GND0) P2.13(GND1) R4.2 R6.1 R52.1 R57.1 R61.2 R181.1 R184.1 R186.1 R188.1 R194.2 R201.1 SW3.1 SW3.2 U1.65(GND) U2.1(VSS1) U2.7(VSS2) U2.11(VSS3) U2.33(VSS4) U2.36(VSS5) U2.37(VSS6) U2.45(VSS7) U2.60(VSS8) U2.64(VSS9) U2.73(VSS10) U2.92(USBVSS) U2.100(VSS11) U2.102(VSS12) U2.105(AIN0) U2.106(AIN1) U2.113(VSS13) U2.114(VSS14) U2.115(VSS15) U2.122(VSS16) U2.138(VSS17) U2.144(VSS18) U15.1(GND) U20.2(GND) U21.2(GND) U22.6(VSSQ1) U22.12(VSSQ2) U22.28(VSS1) U22.41(VSS2) U22.46(VSSQ3) U22.52(VSSQ4) U22.54(VSS3) U23.6(VSSQ1) U23.12(VSSQ2) U23.28(VSS1) U23.41(VSS2) U23.46(VSSQ3) U23.52(VSSQ4) U23.54(VSS3) U24.1(GND) U26.4(GND) Y3.2
CPLD_CLKOUT: R139.1 U1.38(IO_30)
CPLD_CONN_IO0: J11.18 U1.13(IO_10)
CPLD_CONN_IO1: J11.20 U1.11(IO_8)
CPLD_CONN_IO2: J11.30 U1.2(IO_1)
CPLD_CONN_IO3: J11.7 U1.29(IO_21)
CPLD_CONN_IO4: J11.9 U1.26(IO_18)
CPLD_CONN_IO5: J11.11 U1.22(IO_15)
CPLD_CONN_IO6: J11.13 U1.19(IO_12)
CPLD_CONN_IO7: J11.15 U1.18(IO_11)
CPLD_CONN_IO8: J11.17 U1.12(IO_9)
CPLD_CONN_IO9: J11.19 U1.10(IO_7)
CPLD_CONN_IO10: J11.21 U1.9(IO_6)
CPLD_CONN_IO11: J11.23 U1.5(IO_4)
CPLD_CONN_IO12: J11.25 U1.4(IO_3)
CPLD_CONN_IO13: J11.27 U1.3(IO_2)
CPLD_CONN_IO14: J11.29 U1.1(IO_0)
CPLD_CONN_IO15: J11.6 U1.31(IO_23)
CPLD_CONN_IO16: J11.8 U1.30(IO_22)
CPLD_CONN_IO17: J11.10 U1.27(IO_19)
CPLD_CONN_IO18: J11.12 U1.24(IO_16)
CPLD_IO0: U1.47(IO_37) U2.137(CLKR0)
CPLD_IO1: U1.48(IO_38) U2.136(FSR0)
CPLD_IO2: U1.49(IO_39) U2.135(DR0)
CPLD_IO3: U1.50(IO_40) U2.134(CLKX0)
CPLD_IO4: U1.51(IO_41) U2.133(FSX0)
CPLD_IO5: U1.52(IO_42) U2.131(DX0)
CPLD_IO6: U1.62(IO_51) U2.93(/INT0)
CPLD_IO7: U1.61(IO_50) U2.94(/INT1)
CPLD_IO11: U1.53(IO_43) U2.123(CLKR2/MMC2.CMD)
CPLD_IO12: U1.54(IO_44) U2.121(FSR2/MMC2.DAT2)
CPLD_IO13: U1.55(IO_45) U2.120(DR2/MMC2.DAT1)
CPLD_IO14: U1.56(IO_46) U2.119(CLKX2/MMC2.DAT0)
CPLD_IO15: U1.58(IO_47) U2.117(FSX2/MMC2.DAT3)
CPLD_IO16: U1.59(IO_48) U2.116(DX2/MMC2.CLK)
CPLD_IO17: U1.60(IO_49) U2.91(/RST)
CPLD_IO20: J10.5 R137.2 U1.63(IO_52) U2.90(SCL)
CPLD_IO21: J10.3 R138.2 U1.64(IO_53) U2.89(SDA)
CPLD_IO22: R59.1 R60.2 U1.40(IO_31) U2.12(GPIO0)
CPLD_IO23: U1.42(IO_32) U2.10(GPIO1)
CPLD_IO24: U1.43(IO_33) U2.9(GPIO2)
CPLD_IO25: U1.44(IO_34) U2.143(GPIO3)
CPLD_IO26: U1.45(IO_35) U2.142(GPIO4)
CPLD_IO29: U1.46(IO_36) U2.140(TIN/TOUT0)
CPLD_MEM_CS: R197.1 U1.36(IO_28) U26.1(/CS)
CPLD_MISO: R198.1 U1.35(IO_27) U26.2(SO)
CPLD_MOSI: R200.2 U1.33(IO_25) U26.5(SI)
CPLD_RASP_IO0: J10.19 U1.28(IO_20)
CPLD_RASP_IO1: J10.21 U1.25(IO_17)
CPLD_RASP_IO2: J10.24 U1.21(IO_14)
CPLD_RASP_IO3: J10.23 U1.20(IO_13)
CPLD_SCK: R199.2 U1.34(IO_26) U26.6(SCK)
CPLD_TCK: J13.1 R194.1 U1.16(TCK)
CPLD_TDI: J13.9 R196.1 U1.15(TDI)
CPLD_TDO: J13.3 U1.17(TDO)
CPLD_TMS: J13.5 R195.1 U1.14(TMS)
DSP_A0: R142.1 U2.55(A0)
DSP_A1: R143.1 U2.54(A1)
DSP_A2: R144.1 U2.52(A2)
DSP_A3: R145.1 U2.51(A3)
DSP_A4: R146.1 U2.50(A4)
DSP_A5: R147.1 U2.48(A5)
DSP_A6: R148.1 U2.47(A6)
DSP_A7: R149.1 U2.46(A7)
DSP_A8: R150.1 U2.44(A8)
DSP_A9: R151.1 U2.43(A9)
DSP_A10: R152.1 U2.42(A10)
DSP_A12: R154.1 U2.39(A12)
DSP_A13: R155.1 U2.38(A13)
DSP_CAS: R160.1 U2.28(/SDCAS)
DSP_CKE: R161.1 U2.101(XF/CKE)
DSP_CLK: R159.1 U2.31(CLKMEM)
DSP_CS_SDR: R162.2 U2.21(/CE0)
DSP_D0: R165.2 U2.57(D0)
DSP_D1: R166.2 U2.58(D1)
DSP_D2: R167.2 U2.59(D2)
DSP_D3: R168.2 U2.61(D3)
DSP_D4: R169.2 U2.62(D4)
DSP_D5: R170.2 U2.63(D5)
DSP_D6: R171.2 U2.65(D6)
DSP_D7: R172.2 U2.66(D7)
DSP_D8: R173.2 U2.67(D8)
DSP_D9: R174.2 U2.69(D9)
DSP_D10: R175.2 U2.70(D10)
DSP_D11: R176.2 U2.71(D11)
DSP_D12: R177.2 U2.74(D12)
DSP_D13: R178.2 U2.75(D13)
DSP_D14: R179.2 U2.76(D14)
DSP_D15: R180.2 U2.77(D15)
DSP_DM0: R163.2 U2.26(/BE0)
DSP_DM1: R164.2 U2.27(/BE1)
DSP_PWR_EN: R57.2 U1.32(IO_24) U15.5(EN)
DSP_RAS: R157.1 U2.34(/SDRAS)
DSP_SDA10: R156.1 U2.35(SDA10)
DSP_WE: R158.1 U2.32(/SDWE)
DSPCLK: R139.2 U2.13(X2/CLKIN)
JTAG_EMU0: C111.1 J1.13 R2.1 U2.79(EMU0)
JTAG_EMU1: C111.2 J1.14 R3.1 U2.80(EMU1/OFF#)
JTAG_TCK: J1.9 J1.11 R1.1 U2.85(TCK)
JTAG_TDI: J1.3 U2.82(TDI)
JTAG_TDO: J1.7 U2.81(TDO)
JTAG_TMS: J1.1 U2.86(TMS)
JTAG_TRST: J1.2 R4.1 U2.84(/TRST)
SD_CLK: P2.5(CLK) R133.1 U2.124(DX1/MMC1.CLK)
SD_CMD: P2.2(CMD) R134.1 U2.130(CLKR1/MMC1.CMD)
SD_D0: P2.7(DAT0) R191.1 U2.127(CLKX1/MMC1.DAT0)
SD_D1: P2.8(DAT1) R190.1 U2.128(DR1/MMC1.DAT1)
SD_D2: P2.9(DAT2) R192.1 U2.129(FSR1/MMC1.DAT2)
SD_D3: P2.1(DAT3) R193.1 U2.125(FSX1/MMC1.DAT3)
SDA10: R156.2 U22.22(A10) U23.22(A10)
SEMC_A0: R142.2 U22.21(BA1) U23.21(BA1)
SEMC_A1: R143.2 U22.23(A0) U23.23(A0)
SEMC_A2: R144.2 U22.24(A1) U23.24(A1)
SEMC_A3: R145.2 U22.25(A2) U23.25(A2)
SEMC_A4: R146.2 U22.26(A3) U23.26(A3)
SEMC_A5: R147.2 U22.29(A4) U23.29(A4)
SEMC_A6: R148.2 U22.30(A5) U23.30(A5)
SEMC_A7: R149.2 U22.31(A6) U23.31(A6)
SEMC_A8: R150.2 U22.32(A7) U23.32(A7)
SEMC_A9: R151.2 U22.33(A8) U23.33(A8)
SEMC_A10: R152.2 U22.34(A9) U23.34(A9)
SEMC_A12: R154.2 U22.35(A11) U23.35(A11)
SEMC_A13: R155.2 U22.20(BA0) U23.20(BA0)
SEMC_CAS: R160.2 U22.17(C\A\S\) U23.17(C\A\S\)
SEMC_CKE: R161.2 U22.37(CKE) U23.37(CKE)
SEMC_CLK: R159.2 U22.38(CLK) U23.38(CLK)
SEMC_CS_SDR: R162.1 U22.19(C\S\) U23.19(C\S\)
SEMC_D0: R165.1 U22.2(DQ0)
SEMC_D1: R166.1 U22.5(DQ1)
SEMC_D2: R167.1 U22.8(DQ2)
SEMC_D3: R168.1 U22.11(DQ3)
SEMC_D4: R169.1 U22.44(DQ4)
SEMC_D5: R170.1 U22.47(DQ5)
SEMC_D6: R171.1 U22.50(DQ6)
SEMC_D7: R172.1 U22.53(DQ7)
SEMC_D8: R173.1 U23.2(DQ0)
SEMC_D9: R174.1 U23.5(DQ1)
SEMC_D10: R175.1 U23.8(DQ2)
SEMC_D11: R176.1 U23.11(DQ3)
SEMC_D12: R177.1 U23.44(DQ4)
SEMC_D13: R178.1 U23.47(DQ5)
SEMC_D14: R179.1 U23.50(DQ6)
SEMC_D15: R180.1 U23.53(DQ7)
SEMC_DM0: R163.1 U22.39(DQM)
SEMC_DM1: R164.1 U23.39(DQM)
SEMC_RAS: R157.2 U22.18(R\A\S\) U23.18(R\A\S\)
SEMC_WE: R158.2 U22.16(W\E\) U23.16(W\E\)
USB_D+: R136.2 R189.1 U2.3(USB_DP) U21.1
USB_D-: R135.2 U2.4(USB_DN) U21.6
WD_IN: R205.1 U20.4(WDI)
N07496: C33.1 C34.1 C35.1 L2.2 U2.104(ADVDD) U2.107(AVDD)
N0070636: R189.2 U2.2(PU)
N268570: C67.1 J9.S1(SHLD1) J9.S2(SHLD2) J9.S3(SHLD3) J9.S4(SHLD4) R61.1
N268704: J9.2(P2) R135.1
N268710: J9.3(P3) R136.1
N275198: U1.7(IO_5) Y3.3
N278160: U1.37(IO_29)
N287267: C44.1 U2.112(RTCINX1) Y2.1
N287307: C45.1 U2.111(RTCINX2) Y2.2
N294497: C83.1 C84.1 C85.1 L3.2 U2.95(USBPLLVDD)
N317150: R51.2 R52.2 U15.4(VFB)
N317170: D3.1(CATHODE) R6.2
N317314: C48.1 U15.6(VBST)
N317326: C48.2 L4.1 U15.2(SW)
N318893: C98.1 R181.2 R182.1 U18.1(GND/ADJ)
N321963: R184.2 R185.2 U24.4(VFB)
N322075: C99.1 U24.6(VBST)
N322087: C99.2 L5.1 U24.2(SW)
N322111: R183.1 U24.5(EN)
N323461: C109.1 R186.2 R187.1 U25.1(GND/ADJ)
N324026: D4.1(CATHODE) R188.2
N357213: R205.2 U2.6(GPIO7)
N357436: R58.1 U20.3(#EN)
N357516: R59.2 U20.1(#WDO)
N360427: D7.2(ANODE) U2.141(GPIO6)
N361726: R202.2 SW3.3 SW3.4 U2.99(/INT4)
N364436: R203.1 Y3.1
N364531: C144.1 L6.1 R203.2 Y3.4
N376455: R204.1 U2.20(ARDY)
N429962: D7.1(CATHODE) R201.2

Pads without a net: J1 6; J9 4; J10 1 7 8 10 11 12 13 15 16 17 18 22 26 27 28 29 31 32 33 35 36 37 38 40; J11 14 16 22 24 26 28; J13 6 7 8; P2 10; U2 14 15 16 17 19 22 23 25 40 96 97; U21 3 4; U22 4 7 10 13 15 36 40 42 45 48 51; U23 4 7 10 13 15 36 40 42 45 48 51

## Via types
v1: diameter 0.6, hole 0.3, TOP to BOTTOM, 1678 vias

## Routing (per net, layer and track width the routed paths; a pad name or vN(x,y) marks a point on that pad's centre or on a via; arc(x,y) is an arc through that point)
1V6D: length 97.8
  TOP w0.127: 4,74.13 4,75.71 3.93,75.78 ; v1(21.92,43.81) 21.97,43.76 22.45,44.25 U2.41 ; R182.2 9.37,70.35 10.95,71.93 ; 10.95,71.93 U18.2 ; 10.95,71.93 U18.4 ; 19.38,50.01 19.56,50.01 19.75,50.2 19.75,50.38 ; 38.63,49.61 38.73,49.5
  TOP w0.254: U2.83 38.68,51.99 ; U2.87 38.66,54 ; U2.110 37.47,65.74 37.02,65.3 36.37,65.3 ; 26.47,65.18 U2.132 26.47,68.34 C30.1 ; 33.45,65.23 U2.118 33.45,67.59 33.53,67.67 C29.1 ; U2.109 37.95,65.72 37.74,65.51 ; U2.29 19.63,50.5 19.75,50.38 19.38,50.01 U2.30 ; U2.18 20.22,56.01 ; v1(28.45,43.48) U2.53 ; U2.68 35.97,47.19 ; 38.73,49.5 U2.78
  TOP w0.305: C31.1 16.9,56.01 U2.18
  TOP w0.381: C27.1 v1(18.58,72.96) ; C27.1 v1(17.75,72.31) ; C27.1 v1(16.93,72.96)
  TOP w0.508: 16.88,57.12 C19.1 C31.1 ; v1(16.21,72.01) C28.1 v1(17.03,71.34)
  TOP w0.762: 16.66,72.01 17.07,71.6 17.07,71.3 ; 16.66,72.01 18.03,72.01 v1(18.75,71.3) ; 16.66,72.01 v1(16.21,72.01) 16.21,72.24 ; 17.07,71.3 v1(17.03,71.34) ; 17.07,71.3 v1(18.75,71.3) ; 16.73,72.76 17.17,72.31 v1(17.75,72.31) 18.26,72.31 18.75,72.8 ; 16.73,72.76 v1(16.93,72.96) ; 16.73,72.76 16.21,72.24 ; 16.21,72.24 16.16,72.2 16.16,71.33 ; 18.75,72.8 v1(18.75,71.3) ; 18.75,72.8 v1(18.58,72.96)
  TOP w0.889: 3.93,76.71 3.93,75.78 ; C61.1 3.98,74.14 4,74.13 U18.4
  TOP w1.27: v1(18.75,71.3) 18.75,66.24 20.14,64.85
  BOTTOM w0.127: C24.1 32.32,64.43 32.31,64.44
  BOTTOM w0.254: v1(27.94,48.46) 27.94,46.91 28.45,46.41 v1(28.45,43.48)
  BOTTOM w0.508: C26.1 v1(34.65,65.07) ; v1(21.92,43.81) 21.92,47.42 v1(22.77,48.27) 23,48.27 23.01,48.28 23.57,48.28 23.58,48.27 C32.1 v1(23.57,47.42) ; C22.1 38.51,52.2 ; 38.55,53.69 L3.1 38.32,53.58 38.32,53.1 v1(38.3,53.09)
  BOTTOM w0.762: 34.49,64.43 34.46,64.4 ; 34.49,64.43 C24.1 33.13,64.44 v1(32.25,64.44) ; 34.49,64.43 C26.1 C25.1 v1(37.02,64.43) ; v1(38.3,53.09) 38.32,53.07 C22.1 C21.1 C20.1 38.32,48.81 37.96,48.45 37.96,48.27 ; 37.94,48.27 37.92,48.29 37.76,48.29 37.75,48.29 v1(36.8,48.29) ; 37.94,48.27 v1(37.93,48.27) ; 37.94,48.27 37.96,48.27 ; 37.96,48.27 37.96,48.25 38.08,48.25 v1(38.51,47.83) ; C23.1 v1(26.52,65.07) ; C18.1 v1(19.81,55.88) ; C17.1 v1(19.91,50.11)
  vias: v1(6.74,69.27) v1(6.76,73.84) v1(6.77,72.95) v1(6.77,72.04) v1(6.77,71.1) v1(6.77,70.18) v1(8.2,73.81) v1(8.22,72.93) v1(8.22,72.01) v1(8.22,71.07) v1(8.22,70.16) v1(8.19,69.24) v1(9.63,73.81) v1(9.64,72.93) v1(9.64,70.16) v1(9.61,69.24)
1V8D: length 39.1
  TOP w0.127: R187.2 90.02,67.54 87.17,64.69 87.17,60.58
  TOP w0.254: 70.41,48.19 U1.41 70.41,50.49 v1(70.2,50.7) ; 70.76,41.83 70.67,41.83 70.41,41.57 U1.8 70.41,39.67 70.74,39.34 70.74,39.22 v1(70.61,39.22)
  TOP w0.381: 70.76,41.83 73.43,41.83 73.74,42.14 73.74,47.77 73.44,48.08 70.52,48.08 70.41,48.19
  BOTTOM w0.254: C143.1 70.07,49.95 70.2,50.07 v1(70.2,50.7)
  BOTTOM w0.381: v1(70.61,39.22) 70.61,39.91 70.63,39.93
  BOTTOM w0.508: C137.1 v1(90.72,76.97) ; C137.1 v1(89.27,76.97) ; C137.1 v1(90.02,76.35) ; v1(85.8,71.2) C139.1 v1(85.2,71.97) ; C140.1 v1(87.69,67.26) ; C140.1 v1(87.69,68.87) ; C140.1 v1(88.34,68.05) ; C138.1 71.25,41.06 70.63,40.44 70.63,39.93 ; v1(87.3,69.67) C128.1 v1(86.6,70.57)
3V3CPLD: length 121.1
  TOP w0.127: 80.09,76.66 76.81,76.66 65.51,87.96 D4.2 ; R60.1 76.47,66.64 C110.1 76.49,68.07 77.08,68.66 78.94,68.66 79.45,68.15 U20.5 79.45,66.78 79.65,66.57 82.12,66.57 82.7,67.16 82.7,68.15 ; U26.8 v1(81.89,58.95) ; v1(76.26,44.47) 76.24,44.47 76.13,44.36 U1.23
  TOP w0.178: U1.57 65.45,44.76 65.21,44.53 v1(64.57,44.53) ; v1(69.5,39.51) 69.5,39.42 69.55,39.42 69.61,39.49 U1.6
  TOP w0.254: C112.1 79.65,58.87 80.49,58.04 ; C112.1 81.1,60.52 81.11,60.51 R199.1 R200.1 ; C112.1 78.93,60.52 78.92,60.51 R197.2 R198.2 ; U1.39 71.21,50.36 v1(71.47,50.62) ; 90.04,59.36 91.72,59.36 92.2,58.88 92.2,57.38 ; 90.04,59.36 89.79,59.36 ; 90.04,59.36 89.92,59.49 ; R196.2 86.5,55.68 87.9,54.28 89.13,54.28 89.64,54.79 89.64,55.83 90.47,56.67 91.49,56.67 92.2,57.38 ; J11.4 92.2,48.46 92.2,57.38 ; R195.2 86.36,58.6 86.36,59.11 86.61,59.36 89.79,59.36 ; 89.79,59.36 89.92,59.49 ; 89.92,59.49 J13.4
  TOP w0.381: U26.7 79.83,56.77 ; 79.83,56.77 78.56,55.5 U26.3 ; 79.83,56.77 79.83,57.38 80.49,58.04 U26.8
  TOP w0.508: C125.1 79.51,77.2
  BOTTOM w0.127: 69.5,40.93 69.37,41.06 ; 70.52,38.2 L6.2
  BOTTOM w0.254: 75.52,44.47 C118.1 ; 75.52,44.47 v1(76.26,44.47) ; 75.52,44.47 74.55,44.47 73.44,43.36 72.21,43.36 72.01,43.56 ; 72.31,48.2 71.65,48.86 ; v1(69.5,39.51) 69.84,39.17 69.84,38.88 70.52,38.2 ; 69.09,46.15 67.96,46.15 66.71,44.91 ; 69.37,41.06 70.33,42.03 70.33,43.28
  BOTTOM w0.381: v1(69.5,39.51) 69.5,40.93 ; v1(81.89,58.95) 82.8,58.95 85.67,61.82 89.71,61.82 J13.4
  BOTTOM w0.508: 71.65,48.86 C116.1 71.52,49.59 71.47,49.64 v1(71.47,50.62) ; 66.71,44.91 C115.1 65.58,44.78 65.32,44.53 v1(64.57,44.53) ; 69.37,41.06 C114.1
  vias: v1(74.42,50.9) v1(74.39,50.18) v1(75.31,50.9) v1(75.31,50.17) v1(78.51,53.57) v1(78.51,52.25) v1(79.1,53.57) v1(79.07,52.25)
3V3DSP: length 523.8
  TOP w0.127: v1(26.09,43.41) 26.47,43.79 U2.49 ; 28.7,1.52 v1(29.01,1.22) v1(29.51,1.22) ; U2.56 29.97,45.96 30.14,46.13 31.93,46.13 v1(32.33,46.53) ; 10.46,75.95 10.99,75.43 10.99,75.24 ; 10.47,78.54 C59.1 10.82,78.45 ; C91.1 28.51,1.85 v1(29.01,1.85) v1(29.49,1.85) ; 11.04,78.56 11.04,78.44 10.46,77.86 C62.1 ; R51.1 7.95,79.84 8.49,79.3 10.03,79.3 10.26,79.07 ; v1(19.66,53.01) U2.24 17.45,53.01 R204.2 ; 54.33,47.43 53.07,47.43 ; D3.2 44.41,86.31 44.28,86.18 v1(43.79,86.18) ; 57.23,31.22 56.31,31.22 55.55,31.98 55.55,37.57 56.34,38.35 56.34,40.06 57.15,40.87 57.15,41.48 v1(56.52,42.11) ; U2.88 v1(41.45,54.51)
  TOP w0.254: 56.54,30.66 56.54,29.51 56.51,29.48 ; 56.54,30.66 57.15,30.66 57.22,30.73 ; 56.54,30.66 55.83,30.66 55.55,30.38 55.37,30.38 ; 57.18,31.01 57.18,31.12 57.12,31.12 ; v1(29.46,65.24) U2.126 29.46,67.46 29.62,67.61 C16.1 ; 55.37,31.93 55.37,37.64 56.16,38.43 56.16,40.08 56.97,40.89 56.97,41.4 56.52,41.86 ; v1(62.36,35.13) 62.41,35.08 R193.2 ; R134.2 60.97,35.12 v1(60.96,35.13) ; R137.1 64.36,37.03 64.56,36.84 64.58,36.84 ; 19.76,61.29 19.48,61.01 U2.8 ; 64.58,36.84 v1(64.8,36.84) ; 64.58,36.84 64.57,36.85 ; R190.2 v1(56.63,35.16) ; R138.1 61.18,41.48 61.18,40.93 62.94,39.17 62.94,36.88 63.73,36.09 v1(63.73,35.13) 63.85,35.01 R192.2 ; J1.5 50.53,57.98 53.75,57.98 ; v1(37.53,46.38) 37.95,45.96 U2.72 ; v1(55.73,42.16) 55.73,41.68 ; 41.87,61.24 42.08,61.03 42.08,60.21 41.38,59.51 U2.98 ; v1(58.08,35.14) 58.01,35.08 58.07,35.02 R191.2 ; U2.5 19.41,62.51 v1(19.76,62.15) ; U2.139 v1(22.96,65.28) ; v1(59.51,35.13) R133.2
  TOP w0.381: U23.3 35.5,15.69 35.57,15.77 35.57,16.49 ; v1(26.67,28.37) U22.14 ; L2.1 45.77,66.93 46.1,67.26 ; v1(32.66,16.61) 33.07,17.02 U22.49 ; U23.49 33.1,1.37 v1(32.56,0.84) ; v1(26.54,11.94) 26.7,12.09 U23.14 ; C86.1 35.57,16.49 ; 35.57,16.49 36.02,16.49 36.69,15.82 36.73,15.82 36.73,15.54 37.1,15.17 37.1,15.16 ; C75.1 35.47,32.21 U22.3 ; v1(32.25,32.22) 31.63,32.22 30.67,31.26 U22.9 ; v1(29.01,1.85) 29.01,1.64 28.3,1.64 U23.43 28.3,4.85 v1(27.81,5.33) ; U22.27 15.91,30.06 15.85,30.12 v1(15.57,30.12) 15.52,30.12 ; 36.44,32.22 37.07,31.59 U22.1 ; v1(16.28,13.11) 16.31,13.11 U23.27 ; 30.99,16.61 30.7,16.32 U23.9 ; U23.1 37.1,14.94
  TOP w0.508: 54.69,40.28 56.29,41.88 ; 56.29,41.88 v1(56.52,42.11) ; 56.29,41.88 56.29,41.33 55.45,40.49 ; C59.1 11.01,77.44 C62.1 10.46,75.76 10.99,75.24 U18.3 ; 57.44,30.51 57.44,30.8 57.12,31.12 56.18,31.12 ; 57.44,30.51 57.44,28.42 57.38,28.42 57.3,28.35 56.69,28.35 ; 57.44,30.51 56.98,30.96 ; 43.15,88.6 43.26,88.49 44.06,88.49 ; C10.1 41.62,54.67 v1(41.45,54.51) ; v1(41.63,61.48) 41.87,61.24 R202.1 ; v1(30.99,16.64) 28.8,16.64 v1(28.78,16.61) 28.27,17.12 U22.43 ; C87.1 38.42,15.86 37.72,15.16 37.1,15.16 37.1,14.94 ; 56.98,30.96 57.12,30.96 57.18,31.01 ; 56.98,30.96 55.37,30.96 ; v1(42.21,66.45) 42.52,66.45 42.9,66.83 ; 56.69,28.35 56.74,28.29 ; 56.69,28.35 55.55,28.35 55.37,28.52 ; 43.87,88.6 43.92,88.54 44.14,88.54
  TOP w0.762: 54.69,33.48 54.69,40.64 55.73,41.68 ; 54.69,33.48 54.65,33.44 54.65,29.07 54.99,28.73 ; 54.69,33.48 54.99,33.78 ; 54.99,33.78 54.99,37.37 55.45,37.83 55.45,38.25 ; 54.99,33.78 54.99,32.31 55.37,31.93 ; C97.2 C49.2 14.14,82.3 L4.2 ; 55.45,38.25 55.45,40.49 ; 55.45,38.25 56.03,38.84 56.03,40.34 56.52,40.82 v1(56.52,42.11) ; C90.1 15.46,13.09 15.47,13.11 v1(16.28,13.11) ; v1(19.76,62.15) v1(19.76,61.32) 19.76,61.29 ; 56.18,31.12 55.37,31.93 ; 55.37,31.93 55.37,28.52 ; 23.27,61.54 v1(24.08,61.54)
  TOP w1.016: 38.11,63.07 38.11,64.6 40.55,67.04 ; v1(38.15,61.48) 37.03,61.48
  TOP w1.27: 38.11,63.07 37.03,61.99 37.03,61.48 37.02,61.47 ; 54.56,67.36 v1(54.61,67.31) 54.56,67.26 ; 54.56,67.36 53.85,68.07 ; 54.56,67.36 54.56,67.26 ; 17.06,83.22 18.66,83.22 21.59,86.16 43.81,86.16 ; 17.06,83.22 21.18,87.35 43.84,87.35 ; 17.06,83.22 C97.2 ; 69.06,28.75 69.06,26.94 68.15,26.03 61.72,26.03 59.03,23.34 ; 69.06,28.75 v1(68.4,28.09) ; 69.06,28.75 P2.4 ; C74.1 37.03,32.22 C75.1 v1(32.25,32.22) ; 43.87,88.6 v1(43.81,88.6) 20.7,88.6 15.85,83.74 15.85,83.22 ; C86.1 v1(32.66,16.61) v1(28.78,16.61) 26.62,16.61 v1(26.54,16.54) ; v1(26.67,28.37) 27.3,27.74 v1(27.3,21.11) ; 37.02,61.47 38.14,61.47 v1(38.15,61.48) ; 37.02,61.47 v1(34.85,61.47) ; v1(27.81,5.33) 27.81,7.57 26.54,8.84 v1(26.54,11.94) ; 54.56,67.26 v1(53.42,67.26) v1(42.21,67.26) v1(41.43,67.26) ; 46.89,0.84 v1(32.56,0.84) 30.02,0.84 29.34,1.52 C91.1 ; 53.85,68.07 v1(54.05,68.07) ; 53.85,68.07 v1(41.43,68.07)
  BOTTOM w0.254: v1(64.8,36.84) 64.35,36.4 64.31,36.4 63.73,35.81 v1(63.73,35.13) v1(62.36,35.13) v1(60.96,35.13) v1(59.51,35.13) 58.72,35.13 58.71,35.14 v1(58.08,35.14) 56.68,35.14 56.54,35.28
  BOTTOM w0.381: 15.61,30.05 v1(15.57,30.12) ; 15.29,29.11 C80.1 ; C5.1 v1(35.01,57.86) ; C5.1 v1(35.01,59.4) ; C5.1 v1(34.39,58.6) ; C79.1 33.39,17.34 v1(32.66,16.61)
  BOTTOM w0.508: C4.1 42.42,61.48 v1(41.63,61.48) v1(38.15,61.48) ; v1(15.57,30.12) 15.29,29.84 15.29,29.11 ; C2.1 32.4,46.6 v1(32.33,46.53) ; v1(29.46,61.62) 29.55,61.53 C1.1 ; C52.1 v1(68.4,28.09) ; C9.1 19.76,61.07 v1(19.76,61.32) 19.32,61.32 C7.1 ; C12.1 26.35,46.62 26.39,46.58 ; v1(23.95,51.61) 23.91,51.65 C13.1 ; C3.1 34.76,61.56 v1(34.85,61.47) ; v1(37.53,46.38) 37.44,46.29 C11.1 ; 23.2,61.54 22.57,61.54 C14.1
  BOTTOM w0.762: v1(32.33,46.53) 32.33,50.62 v1(33.17,51.46) ; v1(24.08,61.54) 23.9,61.72 23.9,62.99 22.96,63.93 v1(22.96,65.28) ; v1(24.08,61.54) 24.96,61.54 C8.1 ; v1(24.08,61.54) 23.2,61.54 22.97,61.32 v1(19.76,61.32) ; v1(15.57,30.12) 24.92,30.12 v1(26.67,28.37) 27.09,27.95 C78.1 ; v1(34.9,51.54) 34.9,47.78 36.3,46.38 v1(37.53,46.38) ; C76.1 30.4,29.98 ; v1(41.45,54.51) 36.93,54.51 ; 36.93,54.51 36.94,54.52 38.35,54.52 ; 36.93,54.51 v1(34.95,54.51) ; C6.1 29.53,65.18 v1(29.46,65.24) v1(29.46,61.62) ; v1(19.66,53.01) 21.06,51.61 v1(23.95,51.61) ; v1(30.99,16.64) 31.18,16.45 C88.1 ; v1(32.56,0.84) 33.21,1.49 C92.1 ; C89.1 26.61,12 v1(26.54,11.94) 17.45,11.94 v1(16.28,13.11) ; v1(26.09,43.41) 26.09,43.46 26.39,43.76 26.39,50.9 v1(27.05,51.56) ; C77.1 28.22,17.17 v1(28.78,16.61)
  BOTTOM w1.27: v1(26.54,11.94) v1(26.54,16.54) 26.54,20.35 v1(27.3,21.11) ; v1(27.81,5.33) 27.81,1.96 28.24,1.52 29.34,1.52 ; v1(54.61,67.31) v1(54.61,63.37) ; v1(54.61,67.31) 54.61,67.49 54.15,67.95 53.59,67.95 v1(53.44,68.1) v1(53.42,67.26) 53.44,66.14 ; v1(54.61,67.31) 53.44,66.14 ; v1(53.44,63.35) 53.44,66.14 ; v1(26.67,28.37) 28.27,29.97 29.03,29.97 29.04,29.98 C76.1 30.28,30.25 v1(32.25,32.22)
  vias: v1(41.43,66.42) v1(41.47,88.55) v1(41.45,87.38) v1(41.45,86.18) v1(42.28,88.58) v1(42.27,87.38) v1(42.27,86.18) v1(42.27,68.1) v1(43.03,87.38) v1(43.03,86.18) v1(43.05,88.62) v1(43.81,87.38) v1(54.03,63.37) v1(54.89,42.19) v1(55.22,36.27) v1(55.22,35.33) v1(55.22,34.37) v1(55.22,33.4) v1(55.22,32.18) v1(55.4,41.12) v1(55.4,39.98) v1(55.4,38.86) v1(55.45,37.57)
5VIN: length 208.2
  TOP w0.254: U21.5 13.08,61.42 12.62,61.88 12.62,62.33 12.17,62.78 7.56,62.78 ; U24.3 80.82,81.69 80.82,79.23 81.21,78.84 R183.2
  TOP w0.457: C73.1 6.88,62.05 5.71,60.87 J9.1 ; C50.2 2.22,81.47 2.18,81.43
  TOP w0.508: v1(97.94,59.61) 97.94,62.56 ; 97.94,62.56 97.94,82.96 90.25,90.65 65.96,90.65 ; 97.94,62.56 J10.2 ; v1(97.94,57.53) v1(97.94,51.82) ; 65.96,90.65 74.58,82.03 C101.2 ; 65.96,90.65 12.65,90.65 9.88,87.88 6.07,87.88 2.18,84 2.18,70.64 5.05,67.77 5.05,66.4 5.97,65.48 C72.1 C71.1 C73.1 ; C96.2 C95.2 4.84,80.92 4.83,80.93 U15.3 4.68,81.47 C50.2
  TOP w0.762: J10.2 J10.4 ; C101.2 C102.2 77.96,82.03 77.99,82 C103.2 79.95,82 79.96,82 U24.3
  BOTTOM w0.508: v1(97.94,59.61) v1(97.94,57.53) ; v1(97.94,51.82) 97.92,51.82 97.21,51.1 92.3,51.1 J11.2
AGND: length 7.8
  TOP w0.127: 41.27,62.31 v1(41.22,62.31) ; v1(41.12,64.62) 41,64.49 U2.108
  TOP w0.305: C33.2 41.71,62.37 41.65,62.31 41.27,62.31 40.97,62 U2.103
  TOP w0.508: C33.2 C34.2 C35.2
  BOTTOM w0.127: 41.73,63.17 41.05,63.17
DGND: length 188.4
  TOP w0.127: C19.2 15.28,56.8 14.79,56.31 14.55,56.31 v1(14.1,55.85) ; 87.53,47.27 J11.3 ; J11.3 88.47,46.33 ; J11.3 89.41,47.27 ; J11.3 88.47,48.21 ; 95.05,32.08 J10.25 93.17,32.08 ; R194.2 78.38,38.91 v1(78.41,38.89) ; 90.98,51.99 J13.10 ; J13.10 90.98,53.87 ; J13.10 90.04,52.93 ; J1.4 51.82,60.2 ; J1.4 50.87,59.26 ; J1.4 51.82,58.32 ; 96.65,26.06 J10.30 ; J10.30 97.59,27 ; J10.30 95.71,27 ; J10.30 96.65,27.94 ; 94.11,51.46 J10.9 ; J10.9 93.17,52.4 ; J10.9 94.11,53.34 ; 94.11,13.36 J10.39 ; J10.39 95.05,14.3 ; J10.39 94.11,15.24 ; J10.39 93.17,14.3 ; J10.34 97.59,21.92 ; J10.34 96.65,20.98 ; J10.34 95.71,21.92 ; U20.2 v1(80.4,65.63) ; J1.12 51.82,50.04 ; J1.12 51.82,48.16 ; J1.12 50.87,49.1 ; J13.2 90.98,64.03 ; J13.2 90.04,63.09 ; J13.2 91.92,63.09 ; 88.47,48.87 J11.1 ; J11.1 89.41,49.81 ; J11.1 88.47,50.75 ; J11.1 87.53,49.81 ; 50.87,51.64 J1.10 ; J1.10 51.82,52.58 ; J1.10 51.82,50.7 ; J11.5 89.41,44.73 ; J11.5 88.47,45.67 ; J11.5 87.53,44.73 ; 95.71,47.32 J10.14 96.65,46.38 ; 95.71,57.48 J10.6 96.65,56.54 ; 51.82,53.24 J1.8 ; J1.8 50.87,54.18 ; J1.8 51.82,55.12 ; Y3.2 67.74,35.31 ; 96.65,38.76 J10.20 ; J10.20 96.65,40.64 ; J10.20 95.71,39.7 ; 56.98,6.07 56.18,6.88 P2.12 ; C112.2 v1(80.63,62.12) ; U22.28 16.27,19.71 v1(16.18,19.8) ; C127.2 90.21,77.89 v1(90.2,77.88)
  TOP w0.254: 40.88,60.5 v1(41.2,60.5) ; J1.4 53.2,59.26 53.2,59.26 R4.2 ; U2.92 v1(41.33,56.52) ; U2.122 31.47,67.56 31.7,67.79 v1(31.7,67.81) 31.68,67.81 31.62,67.87 ; v1(16.54,61.49) U2.7 ; U2.114 35.46,67.46 ; U2.45 24.46,44.12 24.26,43.92 24.26,43.62 v1(24.36,43.73) ; v1(31.96,43.76) 31.92,43.76 31.92,43.83 31.95,43.87 U2.60 ; v1(20.09,68.25) 20.47,67.87 U2.144 ; U2.73 40.92,47.02 v1(41.35,46.58) ; U2.138 23.47,67.77 v1(23.14,68.1) ; v1(17.35,65.41) 17.35,65.04 17.89,64.49 U2.1 ; J1.8 53.18,54.18 53.2,54.19 C36.2 ; U2.64 33.96,45.92 34.24,46.2 34.24,46.27 v1(34.36,46.27) ; 17.34,59.51 U2.11 ; U2.113 35.97,67.46 ; U2.33 v1(20.02,48.51) ; U2.37 20.47,45.63 20.15,45.95 v1(19.91,45.95) ; v1(17.4,46.52) 17.89,47.02 U2.36 ; U2.115 34.95,67.49
  TOP w0.305: U2.106 41.15,63.5 ; U2.105 41.12,62.99 ; U2.102 40.97,61.49
  TOP w0.381: v1(35.08,4.95) 35.5,4.48 U23.52 ; U22.52 35.47,20 v1(35.05,20.47) ; U22.6 33.07,28.65 v1(32.61,28.19) ; v1(15.47,5.36) 16.3,4.25 U23.28 ; U23.41 26.7,4.65 v1(25.88,5.46) ; U22.46 30.67,19.81 v1(30.89,20.04) ; v1(28.47,28.19) 28.35,28.31 U22.12 ; v1(37.52,4.95) 37.1,4.47 U23.54 ; v1(37.39,20.42) 37.07,20.07 U22.54 ; U23.46 30.7,4.73 v1(30.38,5.08) ; U23.6 33.1,13.39 v1(32.77,13.06)
  TOP w0.457: C72.2 C71.2
  TOP w0.635: C110.2 77.44,67.95 v1(77.32,68.07)
  BOTTOM w0.127: J10.14 96.65,48.26 ; J10.14 95.71,47.32 ; J10.14 97.59,47.32 ; J10.14 96.65,46.38 ; 50.87,51.64 J1.10 ; J1.10 51.82,52.58 ; J1.10 52.76,51.64 ; J1.10 51.82,50.7 ; 90.04,52.93 J13.10 ; J13.10 90.98,53.87 ; J13.10 90.98,51.99 ; J13.10 91.92,52.93 ; J10.30 97.59,27 ; J10.30 95.71,27 ; J10.30 96.65,27.94 ; J10.30 96.65,26.06 ; 94.11,13.36 J10.39 ; J10.39 93.17,14.3 ; J10.39 94.11,15.24 ; J10.39 95.05,14.3 ; 93.17,52.4 J10.9 ; J10.9 94.11,53.34 ; J10.9 95.05,52.4 ; 50.87,49.1 J1.12 ; J1.12 52.76,49.1 ; J1.12 51.82,48.16 ; J1.12 51.82,50.04 ; 96.65,38.76 J10.20 ; J10.20 95.71,39.7 ; J10.20 97.59,39.7 ; J10.20 96.65,40.64 ; J10.34 96.65,22.86 ; J10.34 96.65,20.98 ; J10.34 95.71,21.92 ; J10.34 97.59,21.92 ; 87.53,47.27 J11.3 ; J11.3 88.47,48.21 ; J11.3 88.47,46.33 ; J11.3 89.41,47.27 ; J1.8 52.76,54.18 ; J1.8 50.87,54.18 ; J1.8 51.82,55.12 ; J1.8 51.82,53.24 ; J11.5 89.41,44.73 ; J11.5 88.47,45.67 ; J11.5 88.47,43.79 ; J11.5 87.53,44.73 ; J13.2 91.92,63.09 ; J13.2 90.98,64.03 ; J13.2 90.98,62.15 ; J13.2 90.04,63.09 ; J10.25 94.11,33.02 ; J10.25 95.05,32.08 ; J10.25 93.17,32.08 ; J10.25 94.11,31.14 ; 96.65,56.54 J10.6 ; J10.6 96.65,58.42 ; J10.6 95.71,57.48 ; J11.1 89.41,49.81 ; J11.1 88.47,48.87 ; J11.1 87.53,49.81 ; J11.1 88.47,50.75 ; C32.2 24.14,49.87 24.16,49.89 v1(24.47,49.89) ; 50.87,59.26 J1.4 ; J1.4 51.82,60.2 ; J1.4 51.82,58.32 ; J1.4 52.76,59.26 ; C22.2 36.72,53 36.75,53 37.04,53.29 37.04,53.7
  BOTTOM w0.254: v1(67.72,34.87) 67.97,35.13 C144.2
  BOTTOM w0.508: C60.2 v1(12.17,71.91)
  BOTTOM w0.762: C8.2 25.31,59.93 25.83,59.41 ; C22.2 36.7,53.35 36.7,51.7 C21.2 C20.2 ; v1(34.36,46.27) 34,46.63 C2.2
  vias: v1(1.42,90.04) v1(1.45,84.51) v1(1.42,77.6) v1(1.4,70.26) v1(1.42,38) v1(1.37,33.88) v1(1.43,30.75) v1(1.39,28.48) v1(1.39,26.45) v1(1.37,24.05) v1(1.4,21.49) v1(1.36,19.22) v1(1.36,17.19) v1(1.44,14.7) v1(1.44,12.67) v1(1.47,10.47) v1(1.47,8.44) v1(1.47,6.41) v1(1.47,4.38) v1(1.47,2.35) v1(1.48,0.93) v1(1.92,46.32) v1(1.92,44.29) v1(2.44,22.63) v1(2.45,21.69) v1(2.42,15.62) v1(2.49,19.2) v1(2.46,13.26) v1(2.64,68.5) v1(2.72,38.81) v1(2.82,52.68) v1(2.82,50.65) v1(2.8,37.44) v1(2.81,34.85) v1(2.81,32.79) v1(2.81,30.71) v1(2.81,28.4) v1(2.8,25.83) v1(2.87,79.32) v1(2.95,66.52) v1(2.87,24.79) v1(3.1,83.9) v1(3.06,48.14) v1(3.06,42.04) v1(3.15,40.26) v1(3.17,82.3) v1(3.5,8.44) v1(3.5,6.41) v1(3.5,2.35) v1(3.51,0.93) v1(3.79,37.36) v1(3.79,34.85) v1(3.8,32.79) v1(3.79,30.71) v1(3.8,28.37) v1(3.79,25.83) v1(3.87,83.95) v1(4.01,84.84) v1(4.04,80.71) v1(4.02,78.16) v1(4.06,79.32) v1(4.24,66.65) v1(4.25,11.13) v1(4.42,21.06) v1(4.47,22.75) v1(4.62,18.85) v1(4.65,15.7) v1(4.65,13.03) v1(4.83,85.62) v1(4.8,46.72) v1(4.85,56.75) v1(4.85,54.71) v1(4.85,52.68) v1(4.85,50.65) v1(5.03,84.3) v1(5.23,40.23) v1(5.35,41.66) v1(5.54,86.36) v1(5.54,80.85) v1(5.54,79.32) v1(5.53,6.41) v1(5.53,2.35) v1(5.54,0.93) v1(5.59,77.83) v1(5.77,68.02) v1(5.77,66.68) v1(5.84,59) v1(5.94,37.13) v1(5.94,34.85) v1(5.94,33.17) v1(6.24,10.53) v1(6.35,45.02) v1(6.33,42.08) v1(6.5,87) v1(6.53,82.37) v1(6.58,77.6) v1(6.6,66.22) v1(6.73,85.37) v1(6.73,84.33) v1(6.83,48.75) v1(6.89,56.75) v1(6.89,54.71) v1(6.89,52.68) v1(6.85,51.45) v1(7.06,80.75) v1(7.11,78) v1(7.14,38.3) v1(7.32,68) v1(7.34,66.7) v1(7.75,34.85) v1(7.85,76.58) v1(8.14,25.73) v1(8.14,23.8) v1(8.28,66.19) v1(8.28,64.72) v1(8.33,63.35) v1(8.33,62.23) v1(8.33,59.82) v1(8.35,47.02) v1(8.41,85.12) v1(8.42,44.16) v1(8.43,20.8) v1(8.48,19.8) v1(8.46,11.86) v1(8.46,6.84) v1(8.59,83.06) v1(8.64,78.59) v1(8.79,76.25) v1(8.77,4.97) v1(8.77,2.93) v1(8.77,0.9) v1(8.92,56.75) v1(8.92,54.71) v1(8.92,52.68) v1(8.88,51.45) v1(8.94,43.18) v1(9.02,84.25) v1(9.04,80.98) v1(8.99,42.03) v1(8.99,40.74) v1(9.53,87.02) v1(9.67,33.23) v1(9.88,25.04) v1(9.86,23.01) v1(9.86,20.79) v1(9.98,37.13) v1(10.08,50.16) v1(10.21,66.32) v1(10.21,64.8) v1(10.24,63.55) v1(10.27,30.23) v1(10.34,24.08) v1(10.44,42.01) v1(10.38,19.42) v1(10.38,17.39) v1(10.38,15.36) v1(10.38,13.32) v1(10.8,4.97) v1(10.8,2.93) v1(10.8,0.9) v1(10.9,46.72) v1(10.97,90.07) v1(10.95,56.75) v1(10.95,54.71) v1(10.95,52.68) v1(11.03,49.7) v1(11,44.7) v1(11.42,51.52) v1(11.35,7.22) v1(11.51,80.59) v1(11.48,42.47) v1(11.51,9.75) v1(11.76,62.18) v1(12.11,69.52) v1(12.09,66.29) v1(12.12,63.53) v1(12.12,25.65) v1(12.19,73.94) v1(12.17,20.8) v1(12.29,19.39) v1(12.29,17.36) v1(12.29,15.33) v1(12.29,13.3) v1(12.27,11.38) v1(12.45,77.67) v1(12.45,29.72) v1(12.53,88.86) v1(12.53,87.11) v1(12.62,59.97) v1(12.6,42.19) v1(12.7,37.97) v1(12.8,48.54) v1(12.83,4.97) v1(12.83,2.93) v1(12.83,0.9) v1(12.93,46.72) v1(12.98,58.78) v1(12.98,56.75) v1(12.98,54.71) v1(12.98,52.68) v1(13,51.49) v1(13.11,75.13) v1(13.25,62.22) v1(13.31,45.26) v1(13.34,38.94) v1(13.41,69.93) v1(13.44,64.8) v1(13.56,50.16) v1(13.61,27.48) v1(13.74,63.27) v1(13.77,44.03) v1(13.77,42.42) v1(13.84,37.57) v1(13.92,40.51) v1(14.08,74.29) v1(14.29,19.37) v1(14.29,17.34) v1(14.3,11.33) v1(14.44,60.01) v1(14.63,30.71) v1(14.68,76.45) v1(14.73,38.81) v1(14.84,89.83) v1(14.84,88.08) v1(14.84,86.33) v1(14.84,84.58) v1(14.83,80.8) v1(14.76,41.96) v1(14.76,40.51) v1(14.94,46.86) v1(14.94,37.13) v1(14.86,2.93) v1(14.86,0.9) v1(14.96,48.75) v1(14.99,23.23) v1(15.12,58.5) v1(15.29,70.08) v1(15.29,67.82) v1(15.25,44.07) v1(15.29,35.39) v1(15.47,50.16) v1(15.8,22.99) v1(15.82,17.34) v1(15.82,11.33) v1(16.1,57.51) v1(16.1,43.25) v1(16.13,36.86) v1(16.1,25.22) v1(16.13,20.81) v1(16.21,40.54) v1(16.15,38.76) v1(16.18,27.51) v1(16.41,69.01) v1(16.36,42.07) v1(16.53,59.5) v1(16.59,7.22) v1(16.76,74.22) v1(16.76,58.42) v1(16.76,11.38) v1(16.92,9.75) v1(16.89,0.9) v1(17.22,80.5) v1(17.22,79.07) v1(17.22,50.22) v1(17.22,48.51) v1(17.17,42.82) v1(17.53,44.23) v1(17.5,36.45) v1(17.53,32.89) v1(17.63,70.08) v1(17.58,40.51) v1(17.63,38.79) v1(17.65,67.82) v1(18.01,78.16) v1(18.26,42.44) v1(18.54,81.97) v1(18.73,76.27) v1(18.69,74.22) v1(18.93,0.9) v1(19.02,40.49) v1(19.08,38.79) v1(19.52,42.26) v1(19.69,36.48) v1(19.82,73.09) v1(19.89,66.68) v1(20.04,35.03) v1(20.52,40.51) v1(20.5,38.79) v1(20.7,70.36) v1(20.91,82.62) v1(20.95,72.44) v1(20.96,0.9) v1(21.29,75.29) v1(21.54,78.8) v1(21.74,81.92) v1(21.67,34.72) v1(21.95,40.51) v1(21.87,36.78) v1(21.97,70.13) v1(21.97,38.79) v1(22.28,62.81) v1(22.33,60.48) v1(22.28,58.57) v1(22.3,56.79) v1(22.3,54.94) v1(22.28,52.47) v1(22.43,6.88) v1(22.48,71.81) v1(22.68,5.84) v1(22.83,34.29) v1(22.79,8.79) v1(22.99,0.9) v1(23.14,10.92) v1(23.16,13.06) v1(23.44,40.49) v1(23.39,38.79) v1(23.42,7.9) v1(23.57,80.83) v1(23.57,78.8) v1(23.57,76.77) v1(23.57,74.74) v1(23.88,58.81) v1(23.88,57.54) v1(23.88,56.27) v1(23.88,55) v1(23.88,53.73) v1(24.13,33.96) v1(24.36,32.88) v1(24.48,69.19) v1(24.77,72.26) v1(24.84,40.56) v1(24.84,38.81) v1(25.02,0.9) v1(25.29,50.03) v1(25.32,17.22) v1(25.35,13.28) v1(25.4,10.19) v1(25.43,7.24) v1(25.45,62.81) v1(25.48,32.51) v1(25.6,80.83) v1(25.6,78.8) v1(25.6,76.77) v1(25.6,27.46) v1(25.6,24.92) v1(25.63,22.71) v1(25.92,58.81) v1(25.92,57.54) v1(25.92,56.27) v1(25.92,55) v1(25.92,53.73) v1(25.98,35.69) v1(26.06,21.44) v1(26.26,40.51) v1(26.26,38.81) v1(26.47,69.16) v1(26.75,71.96) v1(26.84,74.28) v1(26.82,32.16) v1(27.33,50.03) v1(27.63,78.8) v1(27.64,12.01) v1(27.66,40.56) v1(27.74,38.81) v1(27.9,72.38) v1(27.95,58.81) v1(27.95,57.54) v1(27.95,56.27) v1(27.95,55) v1(27.95,53.73) v1(28.1,84.31) v1(28.09,83.22) v1(28.12,81.22) v1(28.14,62.81) v1(28.08,31.79) v1(28.32,42.67) v1(28.37,20.68) v1(28.52,27.61) v1(28.46,11.7) v1(28.46,10.68) v1(28.7,25.91) v1(28.78,76.22) v1(28.96,31.29) v1(29.06,40.54) v1(29.13,38.84) v1(29.16,36.02) v1(29.36,50.03) v1(29.45,43.13) v1(29.39,26.49) v1(29.64,71.04) v1(29.62,69.29) v1(29.62,13.41) v1(29.82,72.09) v1(29.79,19.94) v1(29.86,27.45) v1(29.98,58.81) v1(29.98,57.54) v1(29.98,56.27) v1(29.98,55) v1(29.98,53.73) v1(29.99,10.68) v1(29.99,9.66) v1(29.99,7.63) v1(30.09,84.31) v1(30.08,83.22) v1(30.08,81.26) v1(30.17,74.76) v1(30.53,40.51) v1(30.63,38.81) v1(30.73,78.18) v1(30.76,62.84) v1(30.81,36.09) v1(30.96,27.46) v1(30.99,13.44) v1(31.39,50.03) v1(31.45,35.18) v1(31.46,70.67) v1(31.47,22.63) v1(31.51,11.7) v1(31.51,9.66) v1(31.51,6.62) v1(31.75,69.39) v1(31.88,84.31) v1(31.87,83.22) v1(31.9,81.29) v1(31.92,79.38) v1(31.9,76.56) v1(32.01,58.81) v1(32.01,57.54) v1(32.01,56.27) v1(32.01,55) v1(32.01,53.73) v1(32.03,27.64) v1(31.98,20.02) v1(32.05,38.81) v1(32.44,43.21) v1(32.54,22.58) v1(32.54,7.67) v1(32.74,31.12) v1(32.69,4.88) v1(32.94,62.84) v1(32.92,35.2) v1(33.15,10.36) v1(33.27,36.53) v1(33.32,20.02) v1(33.51,21.99) v1(33.63,50.04) v1(33.6,38.81) v1(33.55,27.64) v1(33.66,71.04) v1(33.68,40.74) v1(33.72,23.84) v1(33.86,73.23) v1(33.88,6.96) v1(34.11,75.64) v1(34.44,33.32) v1(34.39,28.52) v1(34.37,20.02) v1(34.42,13.46) v1(34.42,10.95) v1(34.46,84.31) v1(34.46,83.22) v1(34.49,81.29) v1(34.51,79.38) v1(34.59,77.22) v1(34.75,38.23) v1(34.67,22.01) v1(34.77,31.14) v1(34.96,67.64) v1(35.43,21.31) v1(35.5,23.84) v1(35.74,13.49) v1(35.76,28.57) v1(35.76,19.99) v1(35.86,69.9) v1(35.91,67.64) v1(35.89,49.81) v1(35.99,35) v1(36.02,6.55) v1(36.25,31.06) v1(36.3,62.76) v1(36.53,60.3) v1(36.5,55.7) v1(36.5,21.35) v1(36.58,84.31) v1(36.58,83.23) v1(36.6,81.3) v1(36.63,79.38) v1(36.55,58.6) v1(36.55,53.49) v1(36.58,11.76) v1(36.7,77.23) v1(36.79,13.46) v1(36.86,72.23) v1(37.16,40.84) v1(37.27,23.84) v1(37.45,15.86) v1(37.49,12.47) v1(37.74,31.37) v1(37.74,17.42) v1(37.82,27.56) v1(38.25,5.63) v1(38.25,4.61) v1(38.25,3.59) v1(38.25,2.58) v1(38.28,58.88) v1(38.25,33.43) v1(38.41,84.31) v1(38.4,83.22) v1(38.43,81.29) v1(38.43,68.91) v1(38.45,79.38) v1(38.53,77.22) v1(38.53,44.37) v1(38.57,72.23) v1(38.58,70.51) v1(38.56,66.93) v1(38.58,45.87) v1(38.68,36.07) v1(38.68,34.47) v1(39.05,23.84) v1(39.24,42.94) v1(39.24,16.03) v1(39.57,20.65) v1(39.68,35.08) v1(39.73,27.58) v1(39.7,12.47) v1(39.77,4.61) v1(39.77,3.59) v1(39.77,2.58) v1(40.01,68.43) v1(40.06,17.53) v1(40.18,84.31) v1(40.17,83.22) v1(40.2,81.29) v1(40.22,79.38) v1(40.3,77.22) v1(40.28,72.23) v1(40.28,32.21) v1(40.54,30.3) v1(40.59,74.78) v1(40.56,36.07) v1(40.83,23.84) v1(40.79,16.59) v1(41.1,52.01) v1(41.1,49.5) v1(41.3,3.59) v1(41.3,2.58) v1(41.45,29.29) v1(41.63,50.77) v1(41.62,45.79) v1(41.66,63.14) v1(41.94,64.77) v1(41.88,43.48) v1(42.14,37.61) v1(42.11,36.53) v1(42.29,58.12) v1(42.44,10.49) v1(42.44,7.65) v1(42.44,6.17) v1(42.44,4.72) v1(42.55,13.31) v1(42.49,11.94) v1(42.65,26.75) v1(42.65,25.22) v1(42.61,23.84) v1(42.62,22.45) v1(42.62,20.98) v1(42.57,19.51) v1(42.67,28.19) v1(42.82,2.58) v1(42.9,34.14) v1(43.03,31.72) v1(43.1,63.17) v1(43.23,65.58) v1(43.23,64.8) v1(43.51,52.53) v1(43.79,58.45) v1(43.87,47.37) v1(44.12,65.58) v1(44.15,64.82) v1(44.15,14.96) v1(44.15,11.91) v1(44.15,10.52) v1(44.12,8.53) v1(44.12,7.54) v1(44.15,6.12) v1(44.12,4.75) v1(44.17,13.33) v1(44.17,9.53) v1(44.2,2.87) v1(44.27,29.29) v1(44.28,28.29) v1(44.31,26.79) v1(44.31,25.39) v1(44.27,24.09) v1(44.32,22.41) v1(44.35,20.91) v1(44.35,19.52) v1(44.4,63.17) v1(44.42,34.39) v1(44.58,53.67) v1(44.68,49.48) v1(44.93,74.78) v1(44.93,72.47) v1(44.91,70.89) v1(44.93,69.16) v1(44.93,57.68) v1(44.93,55.47) v1(45.01,66.14) v1(44.98,32.08) v1(45.09,89.87) v1(45.09,88.39) v1(45.09,86.92) v1(45.09,85.45) v1(45.06,41.66) v1(45.39,61.52) v1(45.39,51.44) v1(45.42,29.84) v1(45.72,63.17) v1(45.77,84.31) v1(45.77,83.22) v1(45.8,81.29) v1(45.82,79.38) v1(45.82,14.61) v1(45.9,77.22) v1(45.92,28.17) v1(45.9,25.22) v1(45.95,23.95) v1(46.02,42.19) v1(45.97,26.57) v1(46,22.43) v1(46,20.95) v1(45.97,19.51) v1(46.08,52.2) v1(46.13,10.55) v1(46.16,13.49) v1(46.21,11.89) v1(46.23,7.75) v1(46.23,6.28) v1(46.21,4.83) v1(46.28,44.98) v1(46.36,37.65) v1(46.43,2.87) v1(46.56,59.13) v1(46.99,33.45) v1(47.07,31.42) v1(47.29,88.9) v1(47.42,66.17) v1(47.42,10.67) v1(47.62,70.84) v1(47.62,69.19) v1(47.62,54.77) v1(47.73,65.35) v1(47.73,13.33) v1(47.8,84.31) v1(47.8,83.22) v1(47.82,81.29) v1(47.85,79.38) v1(47.92,77.22) v1(47.93,74.78) v1(47.9,9.68) v1(48.1,48.7) v1(48.09,29.64) v1(48.21,47.32) v1(48.18,44.93) v1(48.18,43.08) v1(48.18,7.82) v1(48.25,57.87) v1(48.39,3.61) v1(48.46,21.67) v1(48.66,50.32) v1(48.74,9.04) v1(48.84,70.82) v1(48.82,69.16) v1(48.79,63.07) v1(48.84,20.56) v1(48.77,14.88) v1(49.2,19.46) v1(49.68,88.9) v1(49.82,84.31) v1(49.82,83.22) v1(49.85,81.29) v1(49.87,79.38) v1(49.95,77.22) v1(49.92,72.22) v1(49.9,47.66) v1(49.88,44.02) v1(49.99,74.75) v1(49.99,41.3) v1(50.19,14.25) v1(50.44,10.77) v1(50.54,55.4) v1(50.54,52.89) v1(50.54,50.45) v1(50.55,49.61) v1(50.51,5.9) v1(50.77,61.07) v1(50.93,12.67) v1(50.88,9.06) v1(50.96,7.74) v1(51.44,44.75) v1(51.49,88.98) v1(51.69,34.82) v1(51.85,84.31) v1(51.84,83.22) v1(51.87,81.29) v1(51.9,79.38) v1(51.87,39.42) v1(51.97,77.22) v1(51.97,74.75) v1(52.02,33.93) v1(51.98,32.54) v1(52.04,27.46) v1(52.02,20.88) v1(52.02,15.85) v1(52.02,12.45) v1(52.06,36.14) v1(52.17,69.13) v1(52.32,62.94) v1(52.37,63.75) v1(52.44,60.41) v1(52.42,45.52) v1(52.37,42.98) v1(52.47,55.45) v1(52.47,52.91) v1(52.5,47.78) v1(52.81,11) v1(53.14,9.93) v1(53.85,39.37) v1(53.85,37.41) v1(53.87,84.31) v1(53.87,83.22) v1(53.89,81.29) v1(53.92,79.38) v1(53.87,41.25) v1(53.87,9.22) v1(54,77.22) v1(53.97,72.22) v1(54,69.16) v1(54.43,74.78) v1(54.36,27.41) v1(54.38,20.85) v1(54.41,15.82) v1(54.38,13.39) v1(55.11,68.49) v1(55.75,65.84) v1(56.28,84.31) v1(56.28,83.25) v1(56.3,81.32) v1(56.33,79.39) v1(56.41,77.23) v1(56.44,74.78) v1(56.38,72.25) v1(56.64,36.04) v1(57.09,33.21) v1(57.43,63.63) v1(57.43,61.93) v1(57.38,42.82) v1(57.4,40.39) v1(57.45,62.71) v1(57.74,56.39) v1(57.79,35.9) v1(58.12,30.1) v1(58.14,28.17) v1(58.27,84.31) v1(58.27,83.22) v1(58.29,81.29) v1(58.32,79.38) v1(58.4,77.22) v1(58.39,74.78) v1(58.37,56.82) v1(58.37,54.81) v1(58.39,52.6) v1(58.41,42.27) v1(58.41,40.93) v1(58.42,33.35) v1(58.52,39.04) v1(58.5,37.85) v1(58.67,65.48) v1(58.9,50.6) v1(58.9,48.72) v1(58.93,45.69) v1(59,56.41) v1(58.98,29.31) v1(59.09,30.64) v1(59.23,37.11) v1(59.39,35.92) v1(59.49,25.35) v1(59.56,70.68) v1(59.92,67.01) v1(59.89,64.24) v1(59.92,38.99) v1(59.94,33.3) v1(59.92,22.12) v1(59.94,19.66) v1(59.92,17.07) v1(59.96,89.84) v1(59.96,85.78) v1(59.99,43.94) v1(59.97,36.35) v1(59.98,27.28) v1(59.99,14.63) v1(59.98,12.04) v1(59.98,9.5) v1(59.98,6.96) v1(59.98,4.42) v1(60.1,76.98) v1(60.12,37.85) v1(60.25,84.31) v1(60.25,83.25) v1(60.24,79.38) v1(60.16,41.96) v1(60.27,81.32) v1(60.42,31.78) v1(60.73,30.55) v1(61.01,35.89) v1(61.22,72.45) v1(61.15,42.7) v1(61.34,69.57) v1(61.39,67.97) v1(61.42,65.38) v1(61.37,33.3) v1(61.61,62.84) v1(61.59,61.85) v1(61.59,56.79) v1(61.59,54.81) v1(61.62,52.17) v1(61.61,48.69) v1(61.7,46.23) v1(61.9,31.78) v1(61.99,89.84) v1(61.99,85.78) v1(62,39.24) v1(62.1,36.35) v1(62.3,41.43) v1(62.33,37.82) v1(62.52,27.28) v1(62.52,24.74) v1(62.52,22.2) v1(62.52,19.66) v1(62.52,17.12) v1(62.52,14.58) v1(62.52,12.04) v1(62.52,9.5) v1(62.52,6.96) v1(62.52,4.42) v1(62.64,35.81) v1(62.71,88.89) v1(62.69,82.8) v1(62.84,33.27) v1(62.89,74.19) v1(62.89,30.51) v1(63.37,83.74) v1(63.45,69.11) v1(63.45,65.81) v1(63.43,63.17) v1(63.64,41.43) v1(63.68,55.15) v1(63.68,53.62) v1(63.68,52.1) v1(63.69,44.53) v1(64.02,89.84) v1(64.02,85.78) v1(64.33,75.83) v1(64.34,67.46) v1(64.31,62.15) v1(64.33,38.54) v1(64.34,33.27) v1(64.41,64.34) v1(64.36,46.96) v1(64.74,88.89) v1(64.91,40.77) v1(65.06,27.28) v1(65.06,24.74) v1(65.06,22.2) v1(65.06,19.66) v1(65.06,17.12) v1(65.06,14.58) v1(65.06,12.04) v1(65.06,9.5) v1(65.06,6.96) v1(65.06,4.42) v1(65.2,56.67) v1(65.2,55.15) v1(65.2,53.62) v1(65.22,38.1) v1(65.28,32.33) v1(65.25,30.51) v1(65.51,48.56) v1(65.63,77.22) v1(65.91,33.9) v1(66.05,85.78) v1(66.05,83.75) v1(66.74,70.26) v1(66.73,56.67) v1(66.73,55.15) v1(66.73,50.58) v1(66.76,88.89) v1(66.92,78.61) v1(66.85,66.45) v1(66.87,61.32) v1(66.9,40.72) v1(67.03,48.56) v1(67.11,51.69) v1(67.6,24.74) v1(67.6,22.2) v1(67.6,19.66) v1(67.6,17.12) v1(67.6,14.58) v1(67.6,12.04) v1(67.6,9.5) v1(67.6,6.96) v1(67.6,4.42) v1(67.72,89.89) v1(67.72,79.41) v1(67.72,36.91) v1(67.72,35.86) v1(67.72,30.2) v1(68.1,52.17) v1(68.25,47.35) v1(68.25,43.79) v1(68.25,42.6) v1(68.73,86.05) v1(68.73,84.02) v1(68.73,83) v1(68.73,81.98) v1(68.73,80.97) v1(68.73,79.95) v1(68.73,76.9) v1(68.66,34.11) v1(68.79,88.89) v1(69.01,53.31) v1(69.08,70.82) v1(69.11,66.55) v1(69.16,61.29) v1(69.16,56.11) v1(69.8,34.11) v1(69.9,87.86) v1(69.98,30.22) v1(70.14,24.74) v1(70.14,22.2) v1(70.14,19.66) v1(70.14,17.12) v1(70.14,14.58) v1(70.14,12.04) v1(70.14,9.5) v1(70.14,6.96) v1(70.14,4.42) v1(70.25,85.03) v1(70.25,84.02) v1(70.25,81.98) v1(70.25,80.97) v1(70.25,79.95) v1(70.25,78.94) v1(70.25,76.9) v1(70.79,74.75) v1(70.79,47.27) v1(71.04,34.16) v1(71.05,53.42) v1(71.24,71.3) v1(71.25,66.52) v1(71.24,56.14) v1(71.29,61.24) v1(71.58,75.57) v1(71.55,51.41) v1(71.7,89.97) v1(71.77,88.08) v1(71.77,86.05) v1(71.77,83) v1(71.77,80.97) v1(71.77,79.95) v1(71.77,78.94) v1(71.77,77.92) v1(71.77,76.9) v1(71.77,73.86) v1(71.96,37.9) v1(71.96,36.93) v1(71.96,36.07) v1(71.96,35.26) v1(71.96,34.53) v1(72.54,32.65) v1(72.65,51.84) v1(72.68,27.28) v1(72.68,24.74) v1(72.68,22.2) v1(72.68,19.66) v1(72.68,17.12) v1(72.68,14.58) v1(72.68,12.04) v1(72.68,9.5) v1(72.68,6.96) v1(72.68,4.42) v1(73,46.61) v1(73,45.14) v1(72.97,42.6) v1(73.18,61.19) v1(73.15,59.21) v1(73.18,58.27) v1(73.18,56.72) v1(73.2,54.2) v1(73.3,81.98) v1(73.3,80.97) v1(73.3,73.86) v1(73.61,62.56) v1(73.66,71.53) v1(73.69,66.52) v1(73.66,63.37) v1(73.99,53.19) v1(74.1,39.8) v1(74.19,41.38) v1(74.3,59.23) v1(74.27,58.27) v1(74.27,56.72) v1(74.27,54.64) v1(74.77,89.97) v1(74.82,88.08) v1(74.82,86.05) v1(74.82,84.02) v1(74.82,83) v1(74.82,80.97) v1(74.82,79.95) v1(74.82,77.92) v1(74.82,76.9) v1(74.82,75.89) v1(74.82,74.87) v1(74.82,73.86) v1(75.03,68.5) v1(75.03,66.55) v1(74.96,30.53) v1(75.06,71.88) v1(75.06,63.27) v1(75.13,58.5) v1(75.13,51.79) v1(75.16,60.12) v1(75.22,27.28) v1(75.22,24.74) v1(75.22,22.2) v1(75.22,19.66) v1(75.22,17.12) v1(75.22,14.58) v1(75.22,12.04) v1(75.22,9.5) v1(75.22,6.96) v1(75.22,4.42) v1(75.39,41.38) v1(75.51,70.13) v1(75.46,39.83) v1(75.56,53.54) v1(75.67,57.38) v1(75.74,34.75) v1(75.82,52.27) v1(75.95,81.22) v1(75.87,61.67) v1(76.11,32.66) v1(76.35,78.94) v1(76.35,77.92) v1(76.3,38.05) v1(76.45,69.14) v1(76.83,59.28) v1(77.14,71.06) v1(77.14,69.88) v1(77.09,43.59) v1(77.16,75.53) v1(77.16,74.52) v1(77.16,73.5) v1(77.16,72.48) v1(77.44,81.21) v1(77.57,30.45) v1(77.72,53.54) v1(77.72,51.38) v1(77.77,52.27) v1(77.8,44.53) v1(77.8,43.8) v1(77.76,27.28) v1(77.76,24.74) v1(77.76,22.2) v1(77.76,19.66) v1(77.76,17.12) v1(77.76,14.58) v1(77.76,12.04) v1(77.76,9.5) v1(77.76,6.96) v1(77.76,4.42) v1(77.87,88.08) v1(77.87,86.05) v1(77.87,84.02) v1(77.87,83) v1(77.87,78.94) v1(77.87,77.92) v1(77.98,38.02) v1(77.98,31.8) v1(79.22,46.23) v1(79.17,30.71) v1(79.39,70.81) v1(79.4,42.29) v1(80.14,81.18) v1(80.19,83.92) v1(80.21,79.15) v1(80.16,39.15) v1(80.15,33.05) v1(80.31,50.01) v1(80.3,27.28) v1(80.3,24.74) v1(80.3,22.2) v1(80.3,19.66) v1(80.3,17.12) v1(80.3,14.58) v1(80.3,12.04) v1(80.3,9.5) v1(80.3,6.96) v1(80.3,4.42) v1(80.54,37.9) v1(80.62,54.79) v1(80.62,36.3) v1(80.7,89.97) v1(80.7,87.91) v1(80.84,85.17) v1(80.85,53.49) v1(80.99,33.02) v1(81.38,79.73) v1(81.99,81.33) v1(81.97,50.01) v1(82.07,83.85) v1(82.12,82.85) v1(82.27,43.15) v1(82.41,86.61) v1(82.37,85.37) v1(82.45,41.05) v1(82.47,36.88) v1(82.56,79.03) v1(82.59,30.61) v1(82.78,78.33) v1(82.84,27.28) v1(82.84,24.74) v1(82.84,22.2) v1(82.84,19.66) v1(82.84,17.12) v1(82.84,14.58) v1(82.84,12.04) v1(82.84,9.5) v1(82.84,6.96) v1(82.96,84.63) v1(83.24,72.09) v1(83.24,64.26) v1(83.16,53.59) v1(83.64,68.4) v1(83.74,55.73) v1(83.67,46.23) v1(83.85,62.84) v1(83.9,86.69) v1(84.23,79.1) v1(84.38,73.25) v1(84.51,47.75) v1(84.71,79.64) v1(84.68,65.94) v1(84.76,28.5) v1(84.91,17.58) v1(85.01,34.34) v1(85.06,89.97) v1(85.15,19.41) v1(85.19,39.52) v1(85.34,86.72) v1(85.38,14.58) v1(85.38,12.04) v1(85.38,9.5) v1(85.38,6.96) v1(85.38,4.42) v1(85.47,81.51) v1(85.46,21.57) v1(85.66,23.93) v1(85.93,35.26) v1(86.03,31.01) v1(86.22,33.55) v1(86.45,24.62) v1(86.71,32.99) v1(86.84,68.12) v1(86.84,37.21) v1(86.87,38.35) v1(87.02,42.77) v1(87.02,41.55) v1(87.05,17.12) v1(87.02,15.24) v1(87.1,29.98) v1(87.25,45.03) v1(87.22,31.62) v1(87.27,50.5) v1(87.33,40.16) v1(87.29,34.6) v1(87.3,28.96) v1(87.43,26.34) v1(87.56,12.22) v1(87.56,9.68) v1(87.56,7.14) v1(87.56,4.6) v1(87.88,51.64) v1(88.01,86.74) v1(88.04,82.4) v1(88.09,64.31) v1(89.08,77.88) v1(89.31,27.89) v1(89.53,42.88) v1(89.54,14.92) v1(89.61,41.53) v1(89.71,64.31) v1(89.71,60.6) v1(89.74,58.62) v1(89.74,57.68) v1(89.74,48.46) v1(89.74,44.35) v1(89.74,39.7) v1(89.74,37.64) v1(89.74,36.68) v1(89.66,35.31) v1(89.69,34.01) v1(89.74,31.62) v1(89.69,29.95) v1(89.69,29.03) v1(89.71,23.83) v1(89.68,18.06) v1(89.84,62.48) v1(89.81,53.37) v1(89.84,51.56) v1(89.76,45.95) v1(89.76,25.74) v1(89.76,22.45) v1(89.78,20.63) v1(89.94,89.97) v1(90.1,12.22) v1(90.1,9.68) v1(90.1,7.14) v1(90.1,4.6) v1(90.22,66.47) v1(90.44,65.14) v1(90.53,43.43) v1(90.93,88.87) v1(90.99,79.42) v1(91.08,67.34) v1(91.44,81.15) v1(91.47,48.64) v1(91.59,77.85) v1(91.59,51.49) v1(91.67,79.15) v1(91.71,65.14) v1(91.9,90.14) v1(92.05,59.92) v1(92.23,68.25) v1(92.38,80.75) v1(92.41,79.15) v1(92.38,69.82) v1(92.44,47.51) v1(92.44,46.24) v1(92.44,44.97) v1(92.44,43.7) v1(92.44,42.43) v1(92.44,39.89) v1(92.44,37.35) v1(92.44,34.81) v1(92.44,32.27) v1(92.44,29.73) v1(92.44,28.46) v1(92.44,27.19) v1(92.44,25.92) v1(92.44,24.65) v1(92.44,22.11) v1(92.44,20.84) v1(92.44,19.57) v1(92.44,18.3) v1(92.44,17.03) v1(92.44,15.76) v1(92.44,14.49) v1(92.44,13.22) v1(92.48,62.51) v1(92.61,23.77) v1(92.64,12.22) v1(92.64,9.68) v1(92.64,7.14) v1(92.64,4.6) v1(92.79,48.44) v1(92.91,81.86) v1(92.98,66.41) v1(92.98,65.14) v1(92.98,63.87) v1(93.09,88.85) v1(93.6,68.33) v1(93.8,81.15) v1(93.8,69.77) v1(94.25,66.41) v1(94.25,65.14) v1(94.25,63.87) v1(94.61,58.75) v1(94.89,35.59) v1(95.18,12.22) v1(95.18,9.68) v1(95.18,7.14) v1(95.4,50.42) v1(95.38,49.1) v1(95.38,47.78) v1(95.43,46.08) v1(95.43,43.46) v1(95.4,41.02) v1(95.4,38.46) v1(95.43,33.99) v1(95.4,32.03) v1(95.4,30.23) v1(95.4,28.35) v1(95.38,25.76) v1(95.35,22.45) v1(95.38,20.68) v1(95.4,18.11) v1(95.43,15.65) v1(95.52,66.41) v1(95.52,65.14) v1(95.52,63.87) v1(95.45,61.26) v1(95.5,59.41) v1(95.53,58.09) v1(95.53,56.36) v1(95.45,23.8) v1(95.61,73.03) v1(95.76,72.19) v1(95.78,71.4) v1(95.81,70.59) v1(95.83,68.25) v1(96.04,77.44) v1(95.96,53.72) v1(96.55,83.36) v1(96.6,85.29) v1(96.79,66.41) v1(96.79,65.14) v1(96.8,63.88) v1(96.98,76.61) v1(97,75.01) v1(97.08,46.05) v1(97.05,43.48) v1(97.08,41) v1(97.08,38.43) v1(97.05,35.86) v1(97.23,73.05) v1(97.16,68.25) v1(97.26,77.47) v1(97.26,72.14) v1(97.26,71.4) v1(97.26,70.61) v1(97.26,53.7) v1(97.36,5.26) v1(97.61,33.17) v1(97.66,49.02) v1(97.82,24.69) v1(98.14,51.01) v1(98.15,30.43) v1(98.15,28.37) v1(98.15,25.78) v1(98.63,86.59) v1(98.63,58.93) v1(98.63,20.65) v1(98.63,18.06) v1(98.63,15.75) v1(98.63,12.29) v1(98.65,90.09) v1(98.68,83.69) v1(98.65,82.47) v1(98.65,74.52) v1(98.65,65.81) v1(98.68,61.26) v1(98.68,23.6) v1(98.65,22.22)
